# Altium PCB demo_dermis_main_testboard.PcbDoc (part 1 of 7)
Units mm, origin at the board's own origin, x right, y up, seen from the top; angles counter-clockwise.
Board outline 348.67 x 252.79 mm, 4 copper layers (Top Layer, Layer 1, Layer 2, Bottom Layer), stack 0.603 mm thick; 389 components, 231 nets, 2086 pads, 2626 vias.
Unrouted connection lines stored in the file: 34.
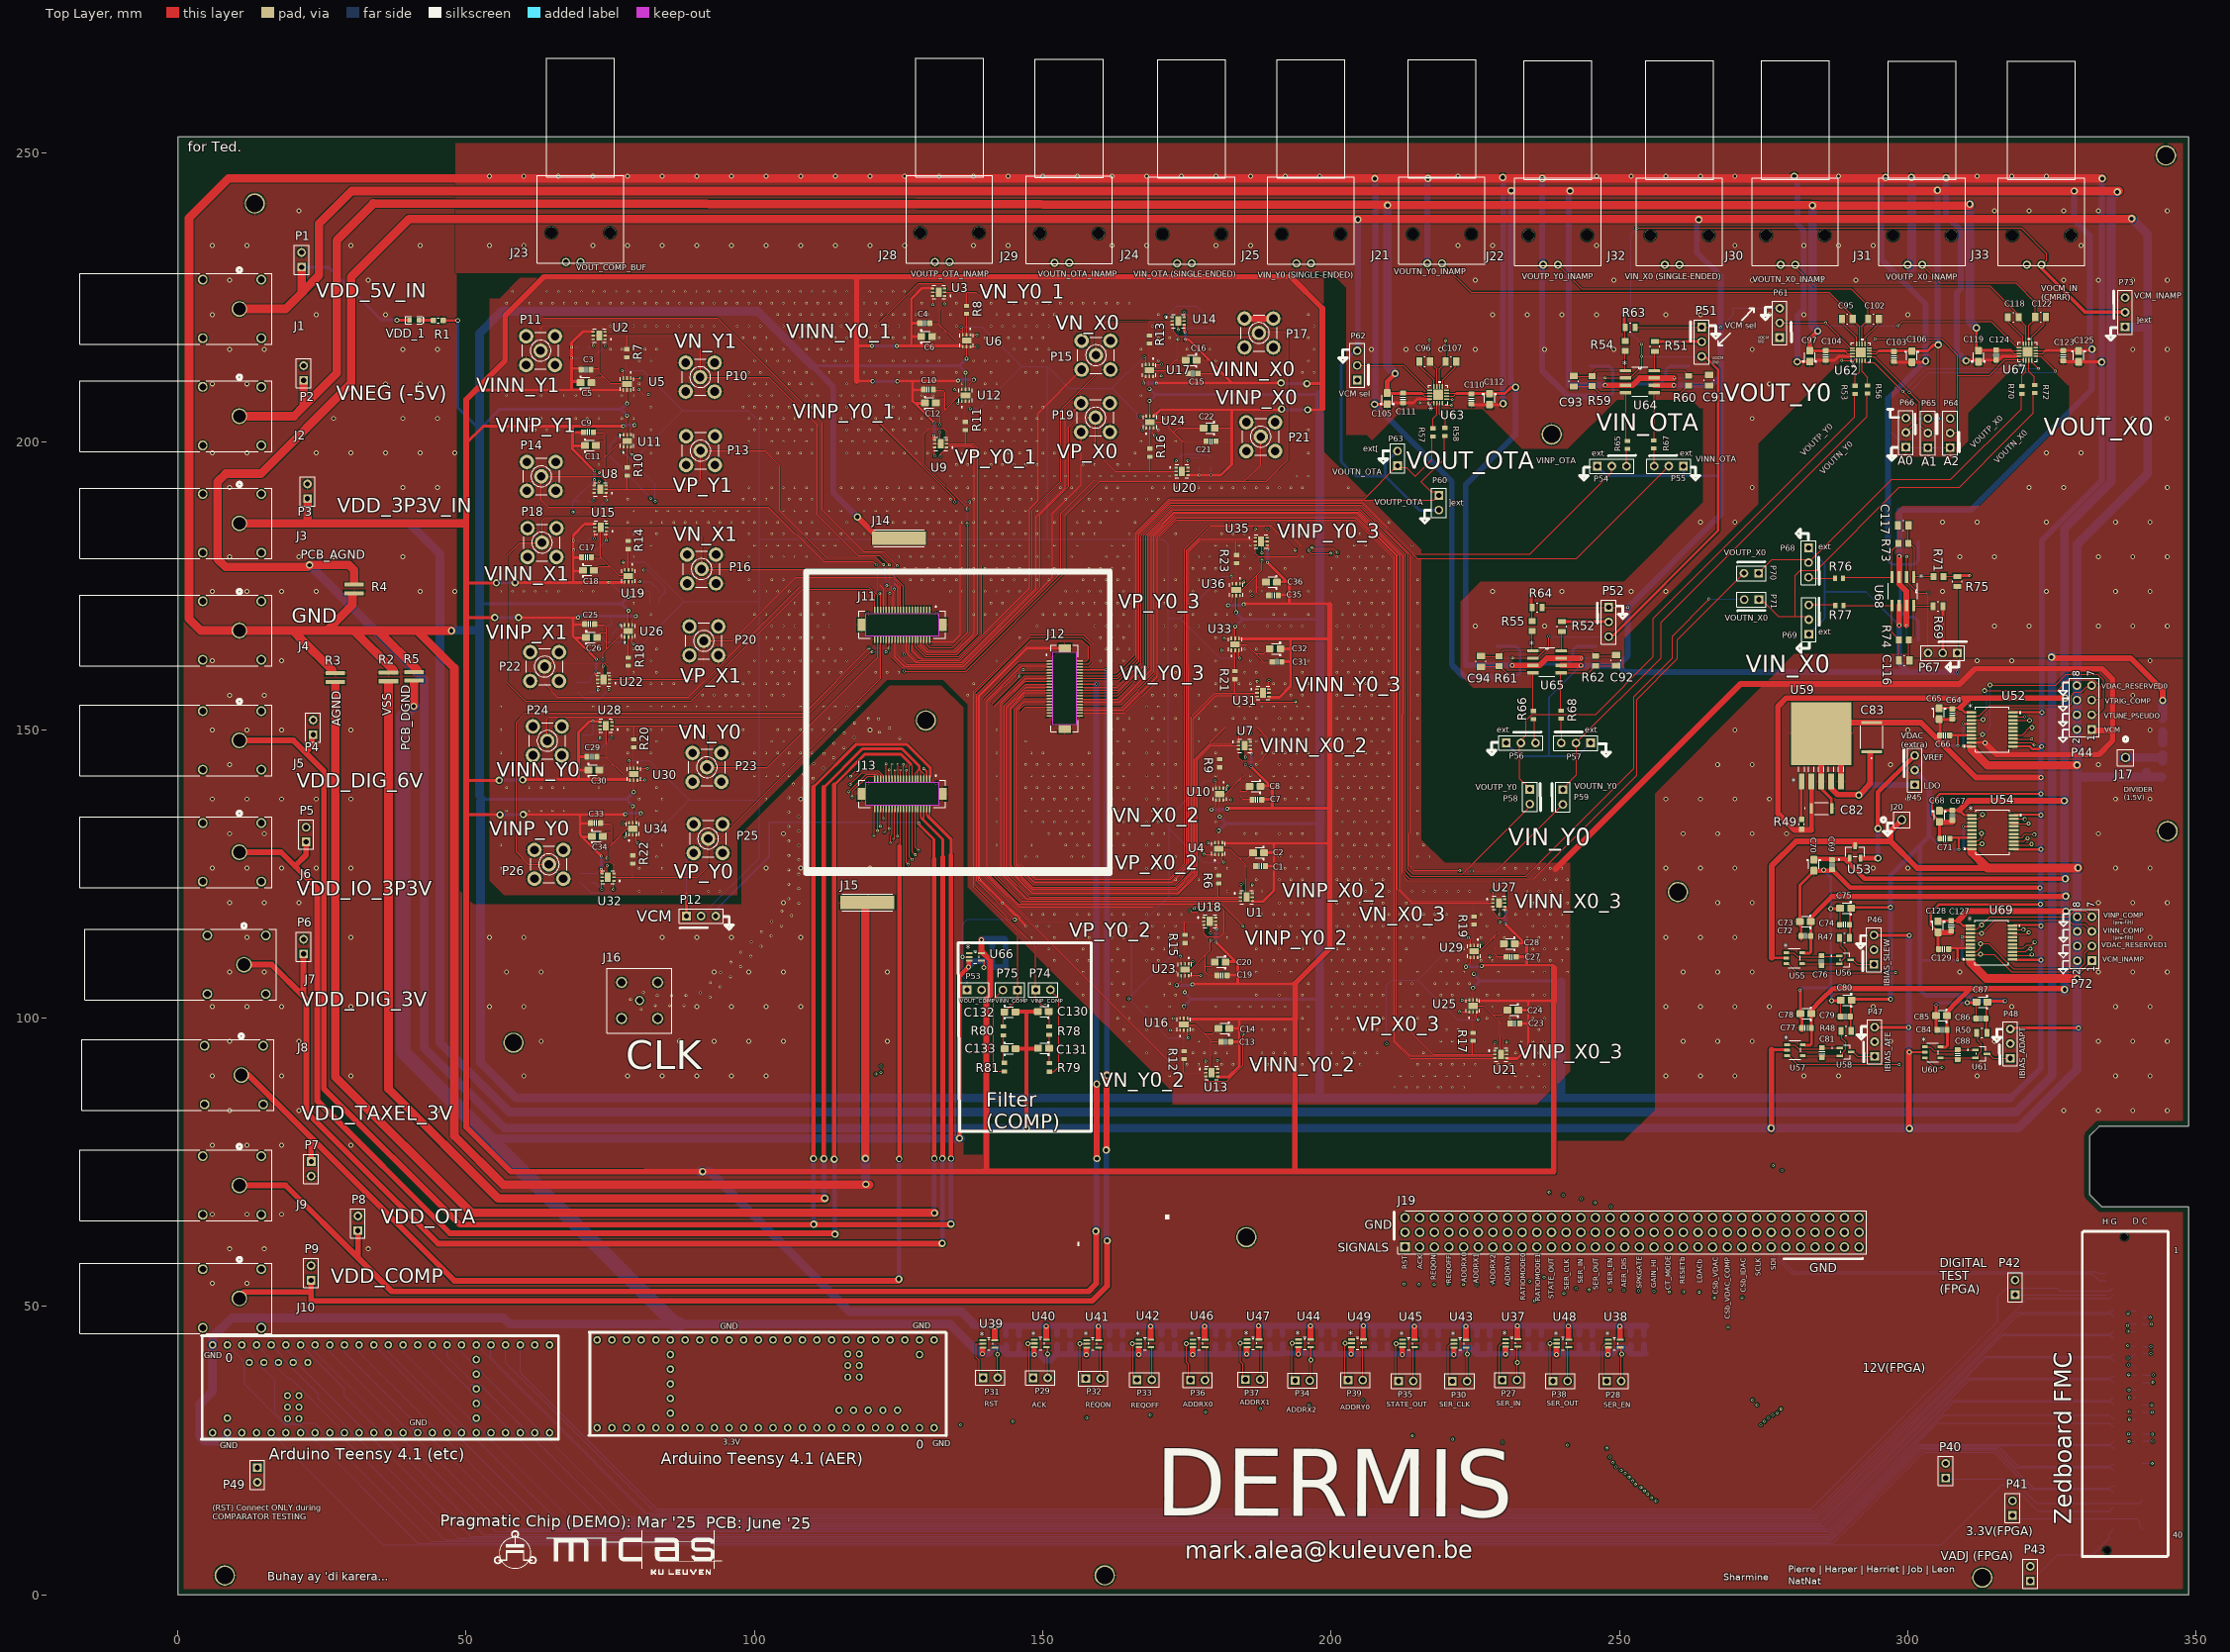
[diagram p0: Top Layer view]
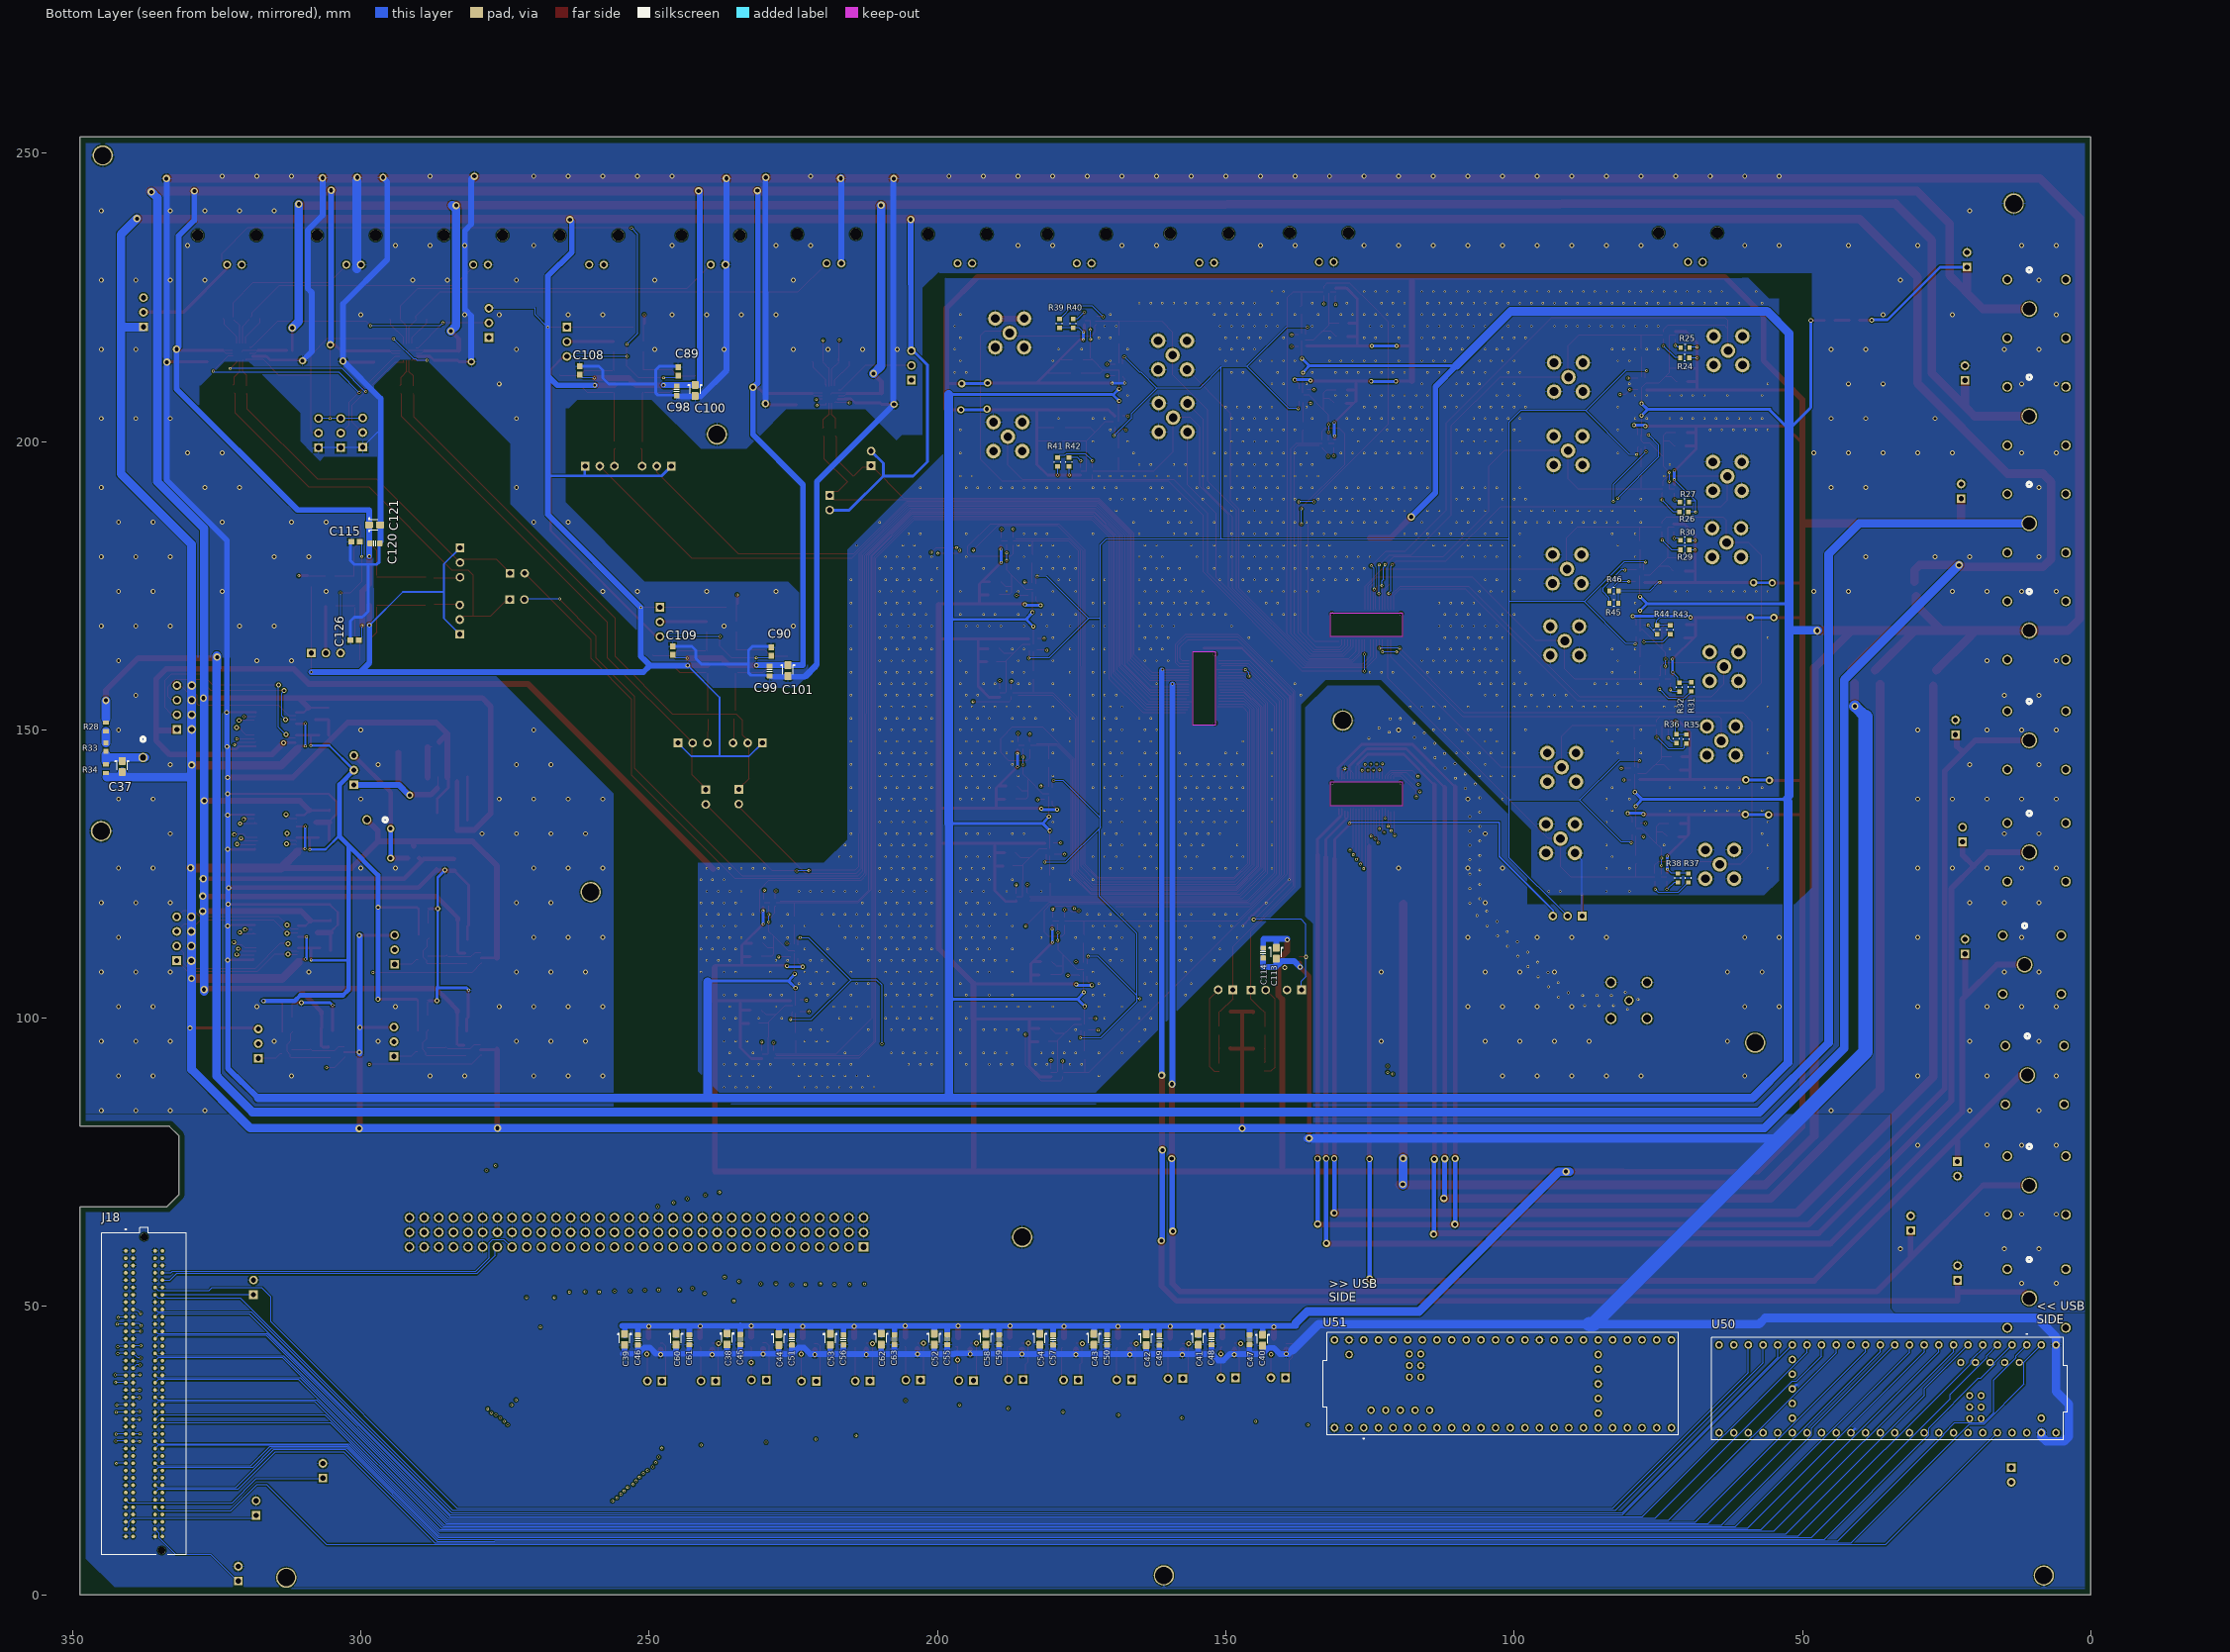
[diagram p1: Bottom Layer view, seen from below]
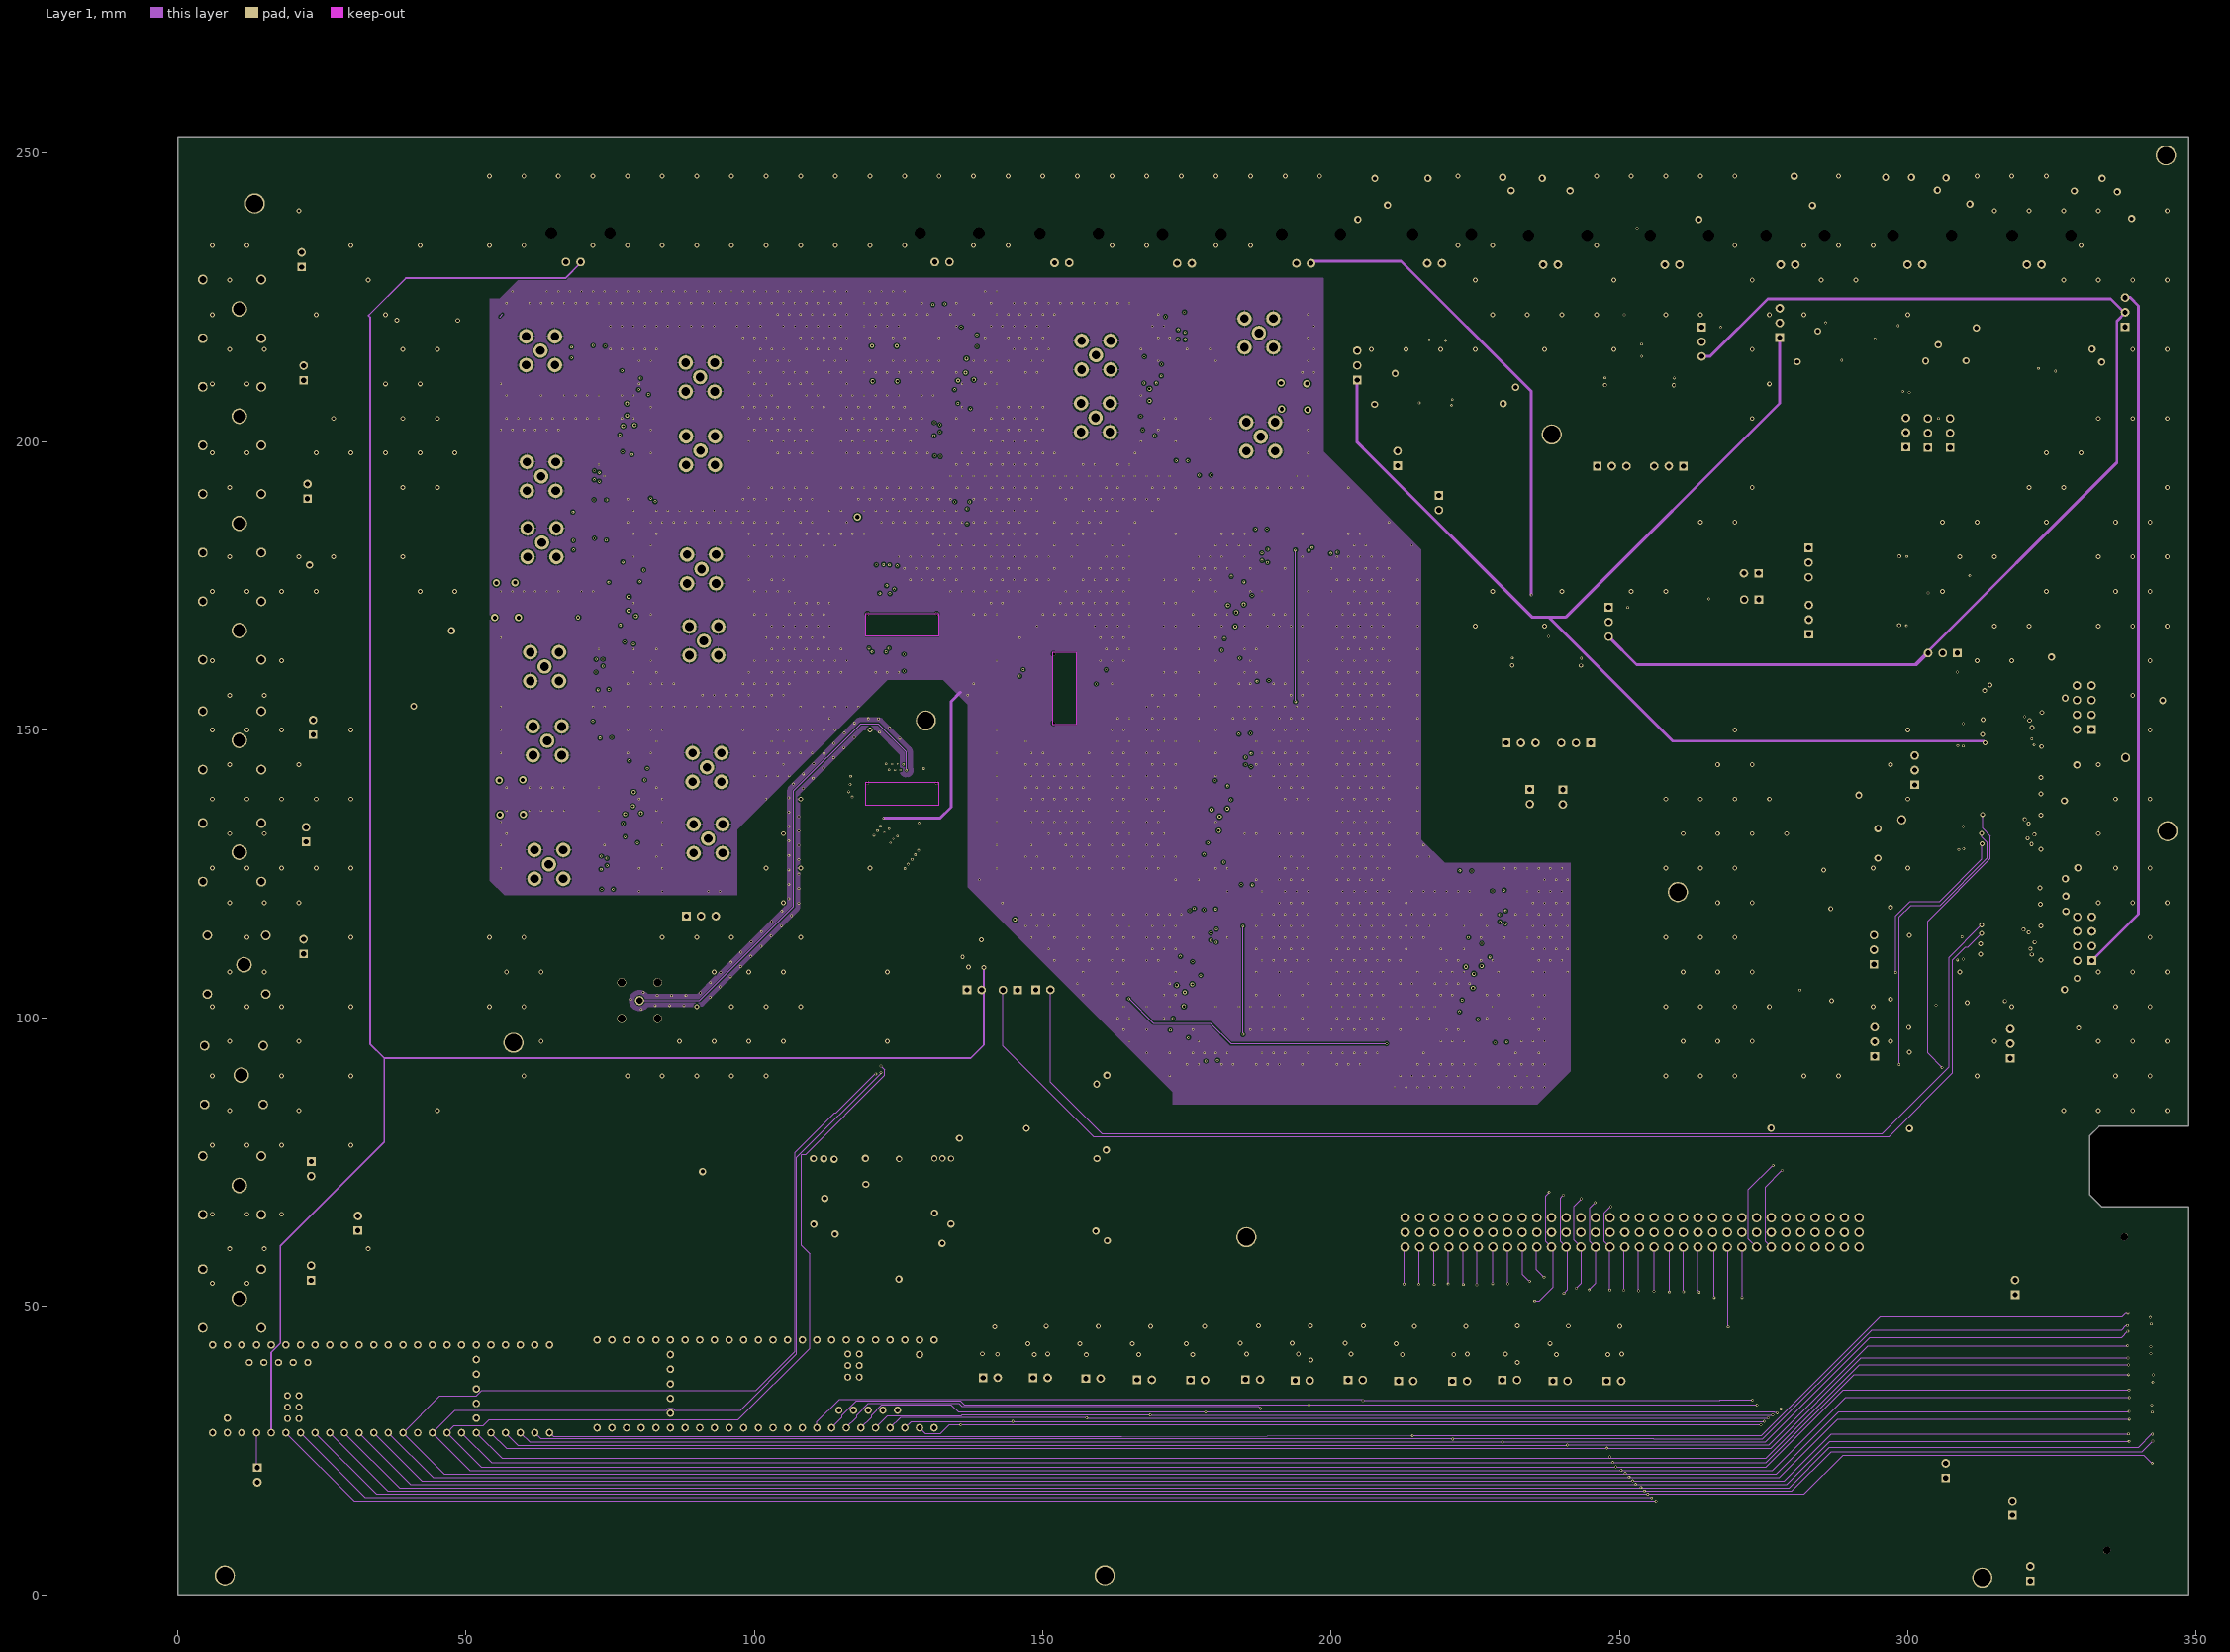
[diagram p2: Layer 1]
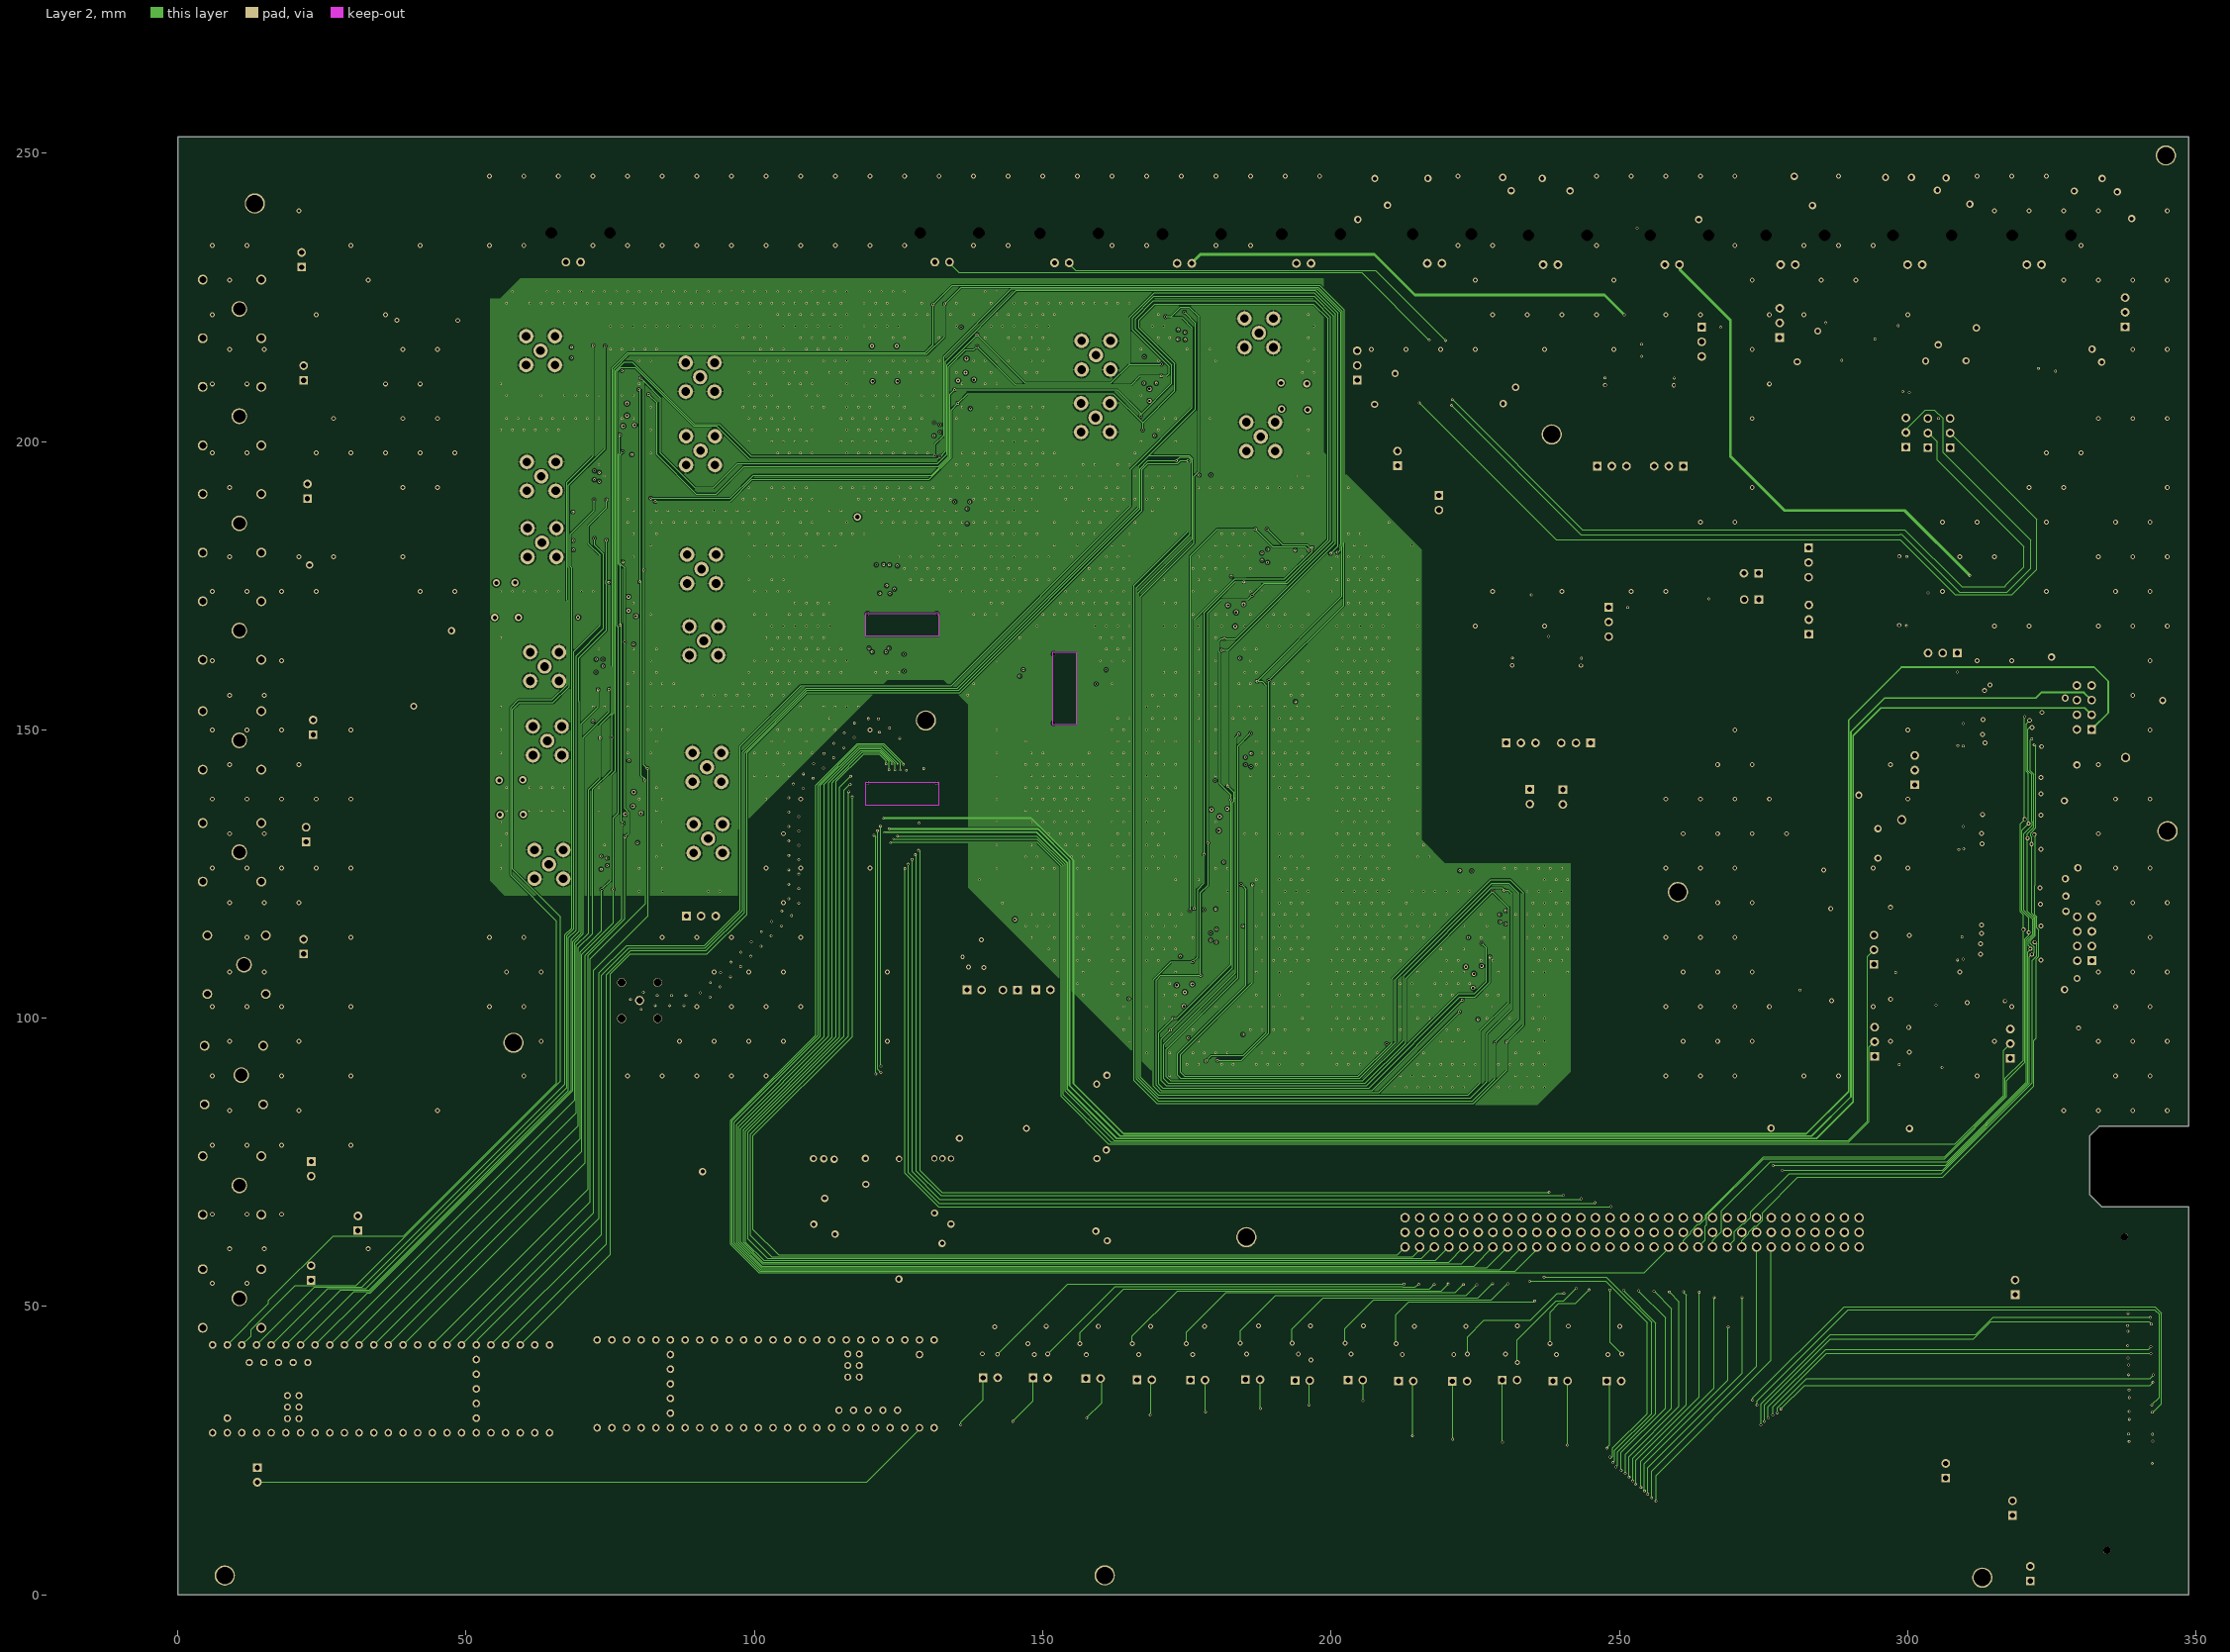
[diagram p3: Layer 2]
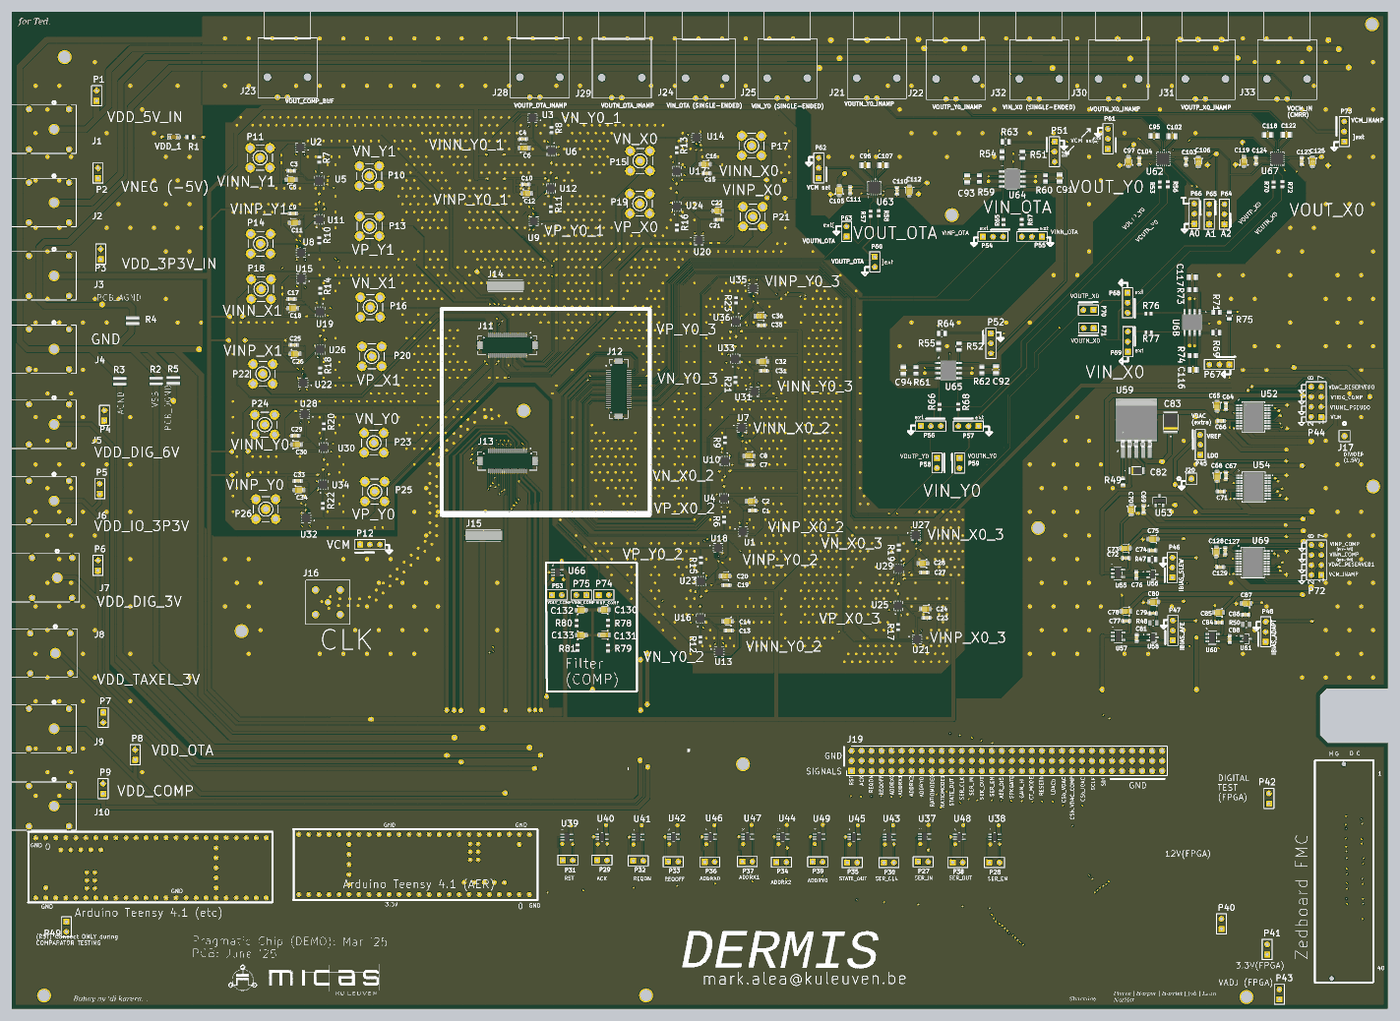
[diagram p9: 3D render of the assembled board from above, using the file's embedded part models]
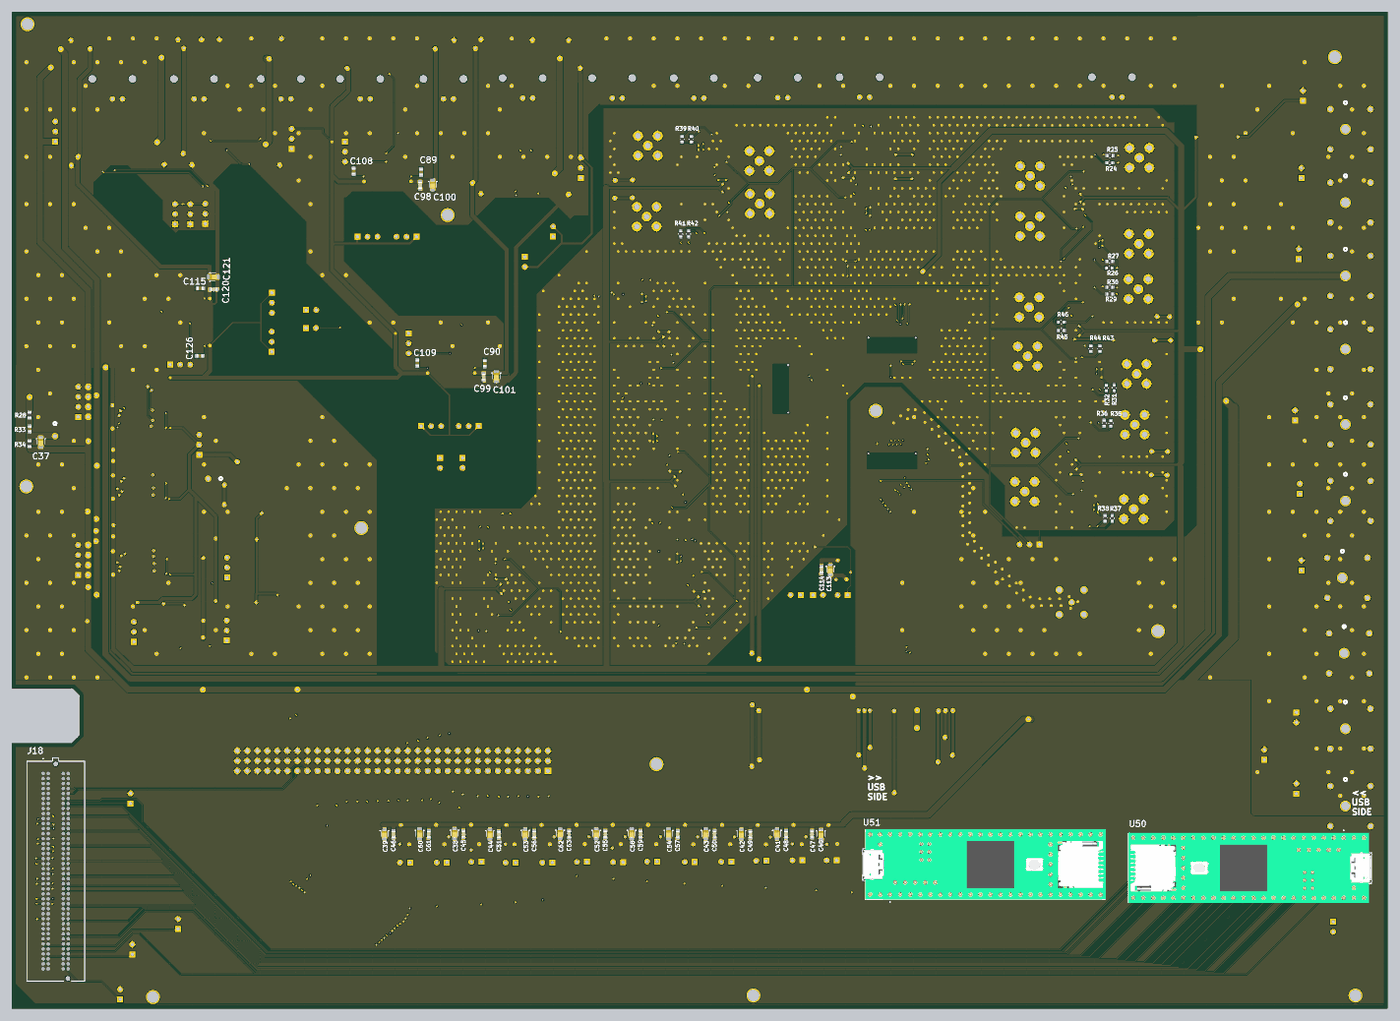
[diagram p10: 3D render of the assembled board from below, using the file's embedded part models]

## Layer stack, top to bottom
Top Solder: solder mask 0.0102, Solder Resist, Dk 3.5
Top Layer: signal copper 0.0356
Dielectric 2: prepreg 0.0711, PP-006, Dk 4.1
Layer 1: signal copper 0.035
Dielectric 1: dielectric 0.32, FR-4, Dk 4.8
Layer 2: signal copper 0.035
Dielectric 3: prepreg 0.0711, PP-006, Dk 4.1
Bottom Layer: signal copper 0.0356
Bottom Solder: solder mask 0.0102, Solder Resist, Dk 3.5

## Board outline
331.542,79.589 333.2,81.247 348.668,81.247 348.668,89.263 348.667,252.789 0,252.789 0,0 348.667,0 348.668,67.317 333.607,67.317 331.542,69.382

## Design rules (kind name [scope] priority, off if disabled: settings)
BoardOutlineClearance [All] p1: gap=1 ignorepadtopadclearanceinfootprint=FALSE except(0: Arc-SplitContinuation Track-SplitContinuation SMDPad-SplitContinuation THPad-SplitContinuation Via-SplitContinuation Fill-SplitContinuation Poly-SplitContinuation Region-SplitContinuation Text-SplitContinuation)
Clearance [OnLayer('Top Layer') vs InNet('VCM')] p1: gap=0.1 ignorepadtopadclearanceinfootprint=FALSE except(0: Arc-Hole Track-Hole SMDPad-Hole THPad-Hole Via-Hole Fill-Hole Poly-Hole Region-Hole Text-Hole; 0.15: Arc-Text Track-Text SMDPad-Text THPad-Text Via-Text Fill-Text Poly-Text Region-Text Text-Text; 0.2: Arc-Via Arc-Poly Track-Via SMDPad-Via THPad-Via THPad-Poly Via-Via Via-Poly Fill-Poly Poly-Poly)
Clearance Clearance_1 [All] p2: gap=0.1 ignorepadtopadclearanceinfootprint=FALSE except(0: Arc-Hole Track-Hole SMDPad-Hole THPad-Hole Via-Hole Fill-Hole Poly-Hole Region-Hole Text-Hole; 0.15: Arc-Text Track-Text SMDPad-Text THPad-Text Via-Text Fill-Text Poly-Text Region-Text Text-Text; 0.2: Arc-Via Arc-Poly Track-Via Track-Poly SMDPad-Via SMDPad-Poly THPad-Via THPad-Poly Via-Via Via-Poly Fill-Poly Poly-Poly)
HoleSize [All] p1: absolutevalues=TRUE maxlimit=6 minlimit=0.2 maxpercent=80.000 minpercent=20.000
HoleToHoleClearance [All] p1: gap=0.25 allowstackedmicrovias=TRUE
MinimumSolderMaskSliver [All] p1: minsoldermaskwidth=0.1
PolygonConnect [All] p1: connectstyle=Relief reliefconductorwidth=0.254 reliefentries=4 polygonreliefangle="90 Angle" airgapwidth=0.254
RoutingVias [All] p1: holewidth=0.711 width=1.27 viastyle="Through Hole" minholewidth=0.075 minwidth=0.2 maxholewidth=0.711 maxwidth=2
SilkToSilkClearance [All] p1: silktosilkclearance=0.15
SilkToSolderMaskClearance [IsPad] p1: minsilkscreentomaskgap=0.15 clearancetoexposedcopper=TRUE
SolderMaskExpansion [All] p1: expansion=0.102
UnpouredPolygon UnpouredPolygon_1 [All] p1:
Width [All] p1: maxlimit=6 minlimit=0.1 preferedwidth=0.254 checkconnectedcopper=TRUE
24 further rules are at their usual default settings.

## Classes and differential pairs
component class demo_dermis_main_testboard_ncd2400: C1 C2 C3 C4 C5 C6 C7 C8 C9 C10 C11 C12 C13 C14 C15 C16 C17 C18 C19 C20 C21 C22 C23 C24 C25 C26 C27 C28 C29 C30 C31 C32 C33 C34 C35 C36 P10 P11 P12 P13 P14 P15 P16 P17 P18 P19 P20 P21 P22 P23 P24 P25 P26 R6 R7 R8 R9 R10 R11 R12 R13 R14 R15 R16 R17 R18 R19 R20 R21 R22 R23 U1 U2 U3 U4 U5 U6 U7 U8 U9 U10 U11 U12 U13 U14 U15 U16 U17 U18 U19 U20 U21 U22 U23 U24 U25 U26 U27 U28 U29 U30 U31 U32 U33 U34 U35 U36
component class demo_dermis_main_testboard_back: C37 J17 R24 R25 R26 R27 R28 R29 R30 R31 R32 R33 R34 R35 R36 R37 R38 R39 R40 R41 R42 R43 R44 R45 R46
component class demo_dermis_main_testboard_dig: C38 C39 C40 C41 C42 C43 C44 C45 C46 C47 C48 C49 C50 C51 C52 C53 C54 C55 C56 C57 C58 C59 C60 C61 C62 C63 J18 J19 P27 P28 P29 P30 P31 P32 P33 P34 P35 P36 P37 P38 P39 P40 P41 P42 P43 P49 U37 U38 U40 U41 U42 U43 U44 U45 U46 U47 U48 U49 U50 U51
component class demo_dermis_main_testboard_ibias: C64 C65 C66 C67 C68 C69 C70 C71 C72 C73 C74 C75 C76 C77 C78 C79 C80 C81 C82 C83 C84 C85 C86 C87 C88 C127 C128 C129 C130 C131 C132 C133 J20 P44 P45 P46 P47 P48 P72 P74 P75 R47 R48 R49 R50 R78 R79 R80 R81 U52 U53 U54 U55 U56 U57 U58 U59 U60 U61 U69
component class demo_dermis_main_testboard: J1 J2 J3 J4 J5 J6 J7 J8 J9 J10 J11 J12 J13 J14 J15 J16 P1 P2 P3 P4 P5 P6 P7 P8 P9 R1 R2 R3 R4 R5 VDD_1
component class demo_dermis_main_testboard_inamps: C89 C90 C91 C92 C93 C94 C95 C96 C97 C98 C99 C100 C101 C102 C103 C104 C105 C106 C107 C108 C109 C110 C111 C112 C113 C114 C115 C116 C117 C118 C119 C120 C121 C122 C123 C124 C125 C126 J21 J22 J23 J24 J25 J28 J29 J30 J31 J32 J33 P51 P52 P53 P54 P55 P56 P57 P58 P59 P60 P61 P62 P63 P64 P65 P66 P67 P68 P69 P70 P71 P73 R51 R52 R53 R54 R55 R56 R57 R58 R59 R60 R61 R62 R63 R64 R65 R66 R67 R68 R69 R70 R71 R72 R73 R74 R75 R76 R77 U62 U63 U64 U65 U66 U67 U68

## Components (designator, comment, footprint, x,y, rotation, side; value= is the part's Value field where it differs from the comment)
C1 "approved sub OK" CAPC1608N 187.743,126.373 r180 top value=100n
C2 "10µ" CAPMP2012X150USR 187.414,128.668 r180 top
C3 "approved sub OK" CAPC1608N 70.786,212.455 r0 top value=100n
C4 "approved sub OK" CAPC1608N 129.523,220.514 r0 top value=100n
C5 "10µ" CAPMP2012X150USR 70.785,210.191 r0 top
C6 "10µ" CAPMP2012X150USR 129.852,218.218 r0 top
C7 "approved sub OK" CAPC1608N 187.117,137.889 r180 top value=100n
C8 "10µ" CAPMP2012X150USR 186.788,140.185 r180 top
C9 "approved sub OK" CAPC1608N 71.221,201.601 r0 top value=100n
C10 "approved sub OK" CAPC1608N 130.149,208.997 r0 top value=100n
C11 "10µ" CAPMP2012X150USR 71.55,199.305 r0 top
C12 "10µ" CAPMP2012X150USR 130.478,206.702 r0 top
C13 "approved sub OK" CAPC1608N 181.706,95.913 r180 top value=100n
C14 "10µ" CAPMP2012X150USR 181.376,98.209 r180 top
C15 "approved sub OK" CAPC1608N 176.034,211.804 r180 top value=100n
C16 "10µ" CAPMP2012X150USR 175.704,214.1 r180 top
C17 "approved sub OK" CAPC1608N 70.867,179.948 r0 top value=100n
C18 "10µ" CAPMP2012X150USR 71.196,177.652 r0 top
C19 "approved sub OK" CAPC1608N 181.08,107.43 r180 top value=100n
C20 "10µ" CAPMP2012X150USR 180.75,109.725 r180 top
C21 "approved sub OK" CAPC1608N 179.171,200.041 r180 top value=100n
C22 "10µ" CAPMP2012X150USR 178.842,202.337 r180 top
C23 "approved sub OK" CAPC1608N 231.843,99.098 r180 top value=100n
C24 "10µ" CAPMP2012X150USR 231.514,101.394 r180 top
C25 "approved sub OK" CAPC1608N 71.42,168.323 r0 top value=100n
C26 "10µ" CAPMP2012X150USR 71.75,166.027 r0 top
C27 "approved sub OK" CAPC1608N 231.217,110.615 r180 top value=100n
C28 "10µ" CAPMP2012X150USR 230.888,112.91 r180 top
C29 "approved sub OK" CAPC1608N 71.809,145.339 r0 top value=100n
C30 "10µ" CAPMP2012X150USR 72.138,143.044 r0 top
C31 "approved sub OK" CAPC1608N 190.604,161.786 r180 top value=100n
C32 "10µ" CAPMP2012X150USR 190.274,164.082 r180 top
C33 "approved sub OK" CAPC1608N 72.435,133.823 r0 top value=100n
C34 "10µ" CAPMP2012X150USR 72.764,131.527 r0 top
C35 "approved sub OK" CAPC1608N 189.978,173.303 r180 top value=100n
C36 "10µ" CAPMP2012X150USR 189.648,175.598 r180 top
C37 "10µ" CAPMP2012X150USR 341.36,143.646 r270 bottom
C38 "10µ" CAPMP2012X150USR 236.473,44.376 r270 bottom
C39 "10µ" CAPMP2012X150USR 254.249,44.286 r270 bottom
C40 "10µ" CAPMP2012X150USR 143.601,44.175 r270 bottom
C41 "10µ" CAPMP2012X150USR 154.747,44.312 r270 bottom
C42 "10µ" CAPMP2012X150USR 163.8,44.258 r270 bottom
C43 "10µ" CAPMP2012X150USR 172.86,44.307 r270 bottom
C44 "10µ" CAPMP2012X150USR 227.509,44.267 r270 bottom
C45 "approved sub OK" CAPC1608N 234.184,44.284 r270 bottom value=100n
C46 "approved sub OK" CAPC1608N 251.96,44.193 r270 bottom value=100n
C47 "approved sub OK" CAPC1608N 145.889,44.268 r270 bottom value=100n
C48 "approved sub OK" CAPC1608N 152.458,44.22 r270 bottom value=100n
C49 "approved sub OK" CAPC1608N 161.512,44.165 r270 bottom value=100n
C50 "approved sub OK" CAPC1608N 170.571,44.215 r270 bottom value=100n
C51 "approved sub OK" CAPC1608N 225.22,44.174 r270 bottom value=100n
C52 "10µ" CAPMP2012X150USR 200.563,44.347 r270 bottom
C53 "10µ" CAPMP2012X150USR 218.58,44.296 r270 bottom
C54 "10µ" CAPMP2012X150USR 182.229,44.307 r270 bottom
C55 "approved sub OK" CAPC1608N 198.275,44.254 r270 bottom value=100n
C56 "approved sub OK" CAPC1608N 216.291,44.204 r270 bottom value=100n
C57 "approved sub OK" CAPC1608N 179.941,44.215 r270 bottom value=100n
C58 "10µ" CAPMP2012X150USR 191.602,44.352 r270 bottom
C59 "approved sub OK" CAPC1608N 189.313,44.26 r270 bottom value=100n
C60 "10µ" CAPMP2012X150USR 245.32,44.315 r270 bottom
C61 "approved sub OK" CAPC1608N 243.031,44.223 r270 bottom value=100n
C62 "10µ" CAPMP2012X150USR 209.732,44.357 r270 bottom
C63 "approved sub OK" CAPC1608N 207.444,44.265 r270 bottom value=100n
C64 "approved sub OK" CAPC1608N 307.698,152.772 r270 top value=100n
C65 "10µ" CAPMP2012X150USR 305.434,152.796 r270 top
C66 "approved sub OK" CAPC1608N 306.383,149.053 r180 top value=100n
C67 "approved sub OK" CAPC1608N 307.717,135.183 r270 top value=100n
C68 "10µ" CAPMP2012X150USR 305.453,135.007 r270 top
C69 "approved sub OK" CAPC1608N 286.841,126.613 r270 top value=100n
C70 "10µ" CAPMP2012X150USR 283.718,126.524 r270 top
C71 "approved sub OK" CAPC1608N 306.421,131.136 r180 top value=100n
C72 "approved sub OK" CAPC1608N 282.298,114.247 r180 top value=100n
C73 "10µ" CAPMP2012X150USR 282.204,116.724 r180 top
C74 "approved sub OK" CAPC1608N 289.029,116.22 r180 top value=100n
C75 "10µ" CAPMP2012X150USR 289.213,119.087 r180 top
C76 "47p" CAPC1608N 285.004,109.975 r90 top
C77 "approved sub OK" CAPC1608N 282.399,98.296 r180 top value=100n
C78 "10µ" CAPMP2012X150USR 282.305,100.773 r180 top
C79 "approved sub OK" CAPC1608N 289.13,100.269 r180 top value=100n
C80 "10µ" CAPMP2012X150USR 289.314,103.136 r180 top
C81 "47p" CAPC1608N 285.105,94.023 r90 top
C82 "C3216X5R1A686M160AC" CAP_3216_TDK 285.041,136.409 r0 top
C83 "C4532X7R1C336M250KC" CAP_4532_TDK 293.711,148.729 r90 top
C84 "approved sub OK" CAPC1608N 305.929,97.962 r180 top value=100n
C85 "10µ" CAPMP2012X150USR 305.835,100.439 r180 top
C86 "approved sub OK" CAPC1608N 312.66,99.935 r180 top value=100n
C87 "10µ" CAPMP2012X150USR 312.844,102.802 r180 top
C88 "47p" CAPC1608N 308.635,93.69 r90 top
C89 "C0603C221K5RACTU" CAPC17595_87N_KEM 244.943,212.149 r90 bottom
C90 "C0603C221K5RACTU" CAPC17595_87N_KEM 228.826,163.565 r90 bottom
C91 "CML0805C0G150JT50V" CAP_CML_0805_.3pF-1500pF,4700pF_STP 265.544,210.631 r270 top value=15p
C92 "CML0805C0G150JT50V" CAP_CML_0805_.3pF-1500pF,4700pF_STP 249.427,162.047 r270 top value=15p
C93 "CML0805C0G150JT50V" CAP_CML_0805_.3pF-1500pF,4700pF_STP 242.063,210.445 r270 top value=15p
C94 "CML0805C0G150JT50V" CAP_CML_0805_.3pF-1500pF,4700pF_STP 225.947,161.862 r270 top value=15p
C95 "CML0805C0G3R0CT50V" CAP_CML_0805_.3pF-1500pF,4700pF_STP 289.491,221.265 r180 top value=3p
C96 "CML0805C0G3R0CT50V" CAP_CML_0805_.3pF-1500pF,4700pF_STP 216.215,213.893 r180 top value=3p
C97 "10µ" CAPMP2012X150USR 282.994,214.812 r90 top
C98 "approved sub OK" CAPC1608N 245.207,208.784 r270 bottom value=100n
C99 "approved sub OK" CAPC1608N 229.091,160.2 r270 bottom value=100n
C100 "10µ" CAPMP2012X150USR 242.018,208.856 r270 bottom
C101 "10µ" CAPMP2012X150USR 225.901,160.272 r270 bottom
C102 "CML0805C0G3R0CT50V" CAP_CML_0805_.3pF-1500pF,4700pF_STP 294.034,221.241 r180 top value=3p
C103 "approved sub OK" CAPC1608N 297.586,214.748 r270 top value=100n
C104 "approved sub OK" CAPC1608N 285.754,214.924 r90 top value=100n
C105 "10µ" CAPMP2012X150USR 209.717,207.44 r90 top
C106 "10µ" CAPMP2012X150USR 300.712,214.713 r270 top
C107 "CML0805C0G3R0CT50V" CAP_CML_0805_.3pF-1500pF,4700pF_STP 220.757,213.869 r180 top value=3p
C108 "C0603C221K5RACTU" CAPC17595_87N_KEM 262.037,212.319 r90 bottom
C109 "C0603C221K5RACTU" CAPC17595_87N_KEM 245.92,163.736 r90 bottom
C110 "approved sub OK" CAPC1608N 224.309,207.376 r270 top value=100n
C111 "approved sub OK" CAPC1608N 212.477,207.552 r90 top value=100n
C112 "10µ" CAPMP2012X150USR 227.435,207.341 r270 top
C113 "10µ" CAPMP2012X150USR 141.246,111.261 r270 bottom
C114 "approved sub OK" CAPC1608N 143.513,111.297 r270 bottom value=100n
C115 "C0603C221K5RACTU" CAPC17595_87N_KEM 300.901,182.616 r0 bottom
C116 "CML0805C0G150JT50V" CAP_CML_0805_.3pF-1500pF,4700pF_STP 299.384,162.016 r180 top value=15p
C117 "CML0805C0G150JT50V" CAP_CML_0805_.3pF-1500pF,4700pF_STP 299.198,185.496 r180 top value=15p
C118 "CML0805C0G3R0CT50V" CAP_CML_0805_.3pF-1500pF,4700pF_STP 318.277,221.545 r180 top value=3p
C119 "10µ" CAPMP2012X150USR 312.235,214.8 r90 top
C120 "approved sub OK" CAPC1608N 297.537,182.352 r180 bottom value=100n
C121 "10µ" CAPMP2012X150USR 297.608,185.541 r180 bottom
C122 "CML0805C0G3R0CT50V" CAP_CML_0805_.3pF-1500pF,4700pF_STP 323.028,221.575 r180 top value=3p
C123 "approved sub OK" CAPC1608N 326.929,214.897 r270 top value=100n
C124 "approved sub OK" CAPC1608N 315.312,214.995 r90 top value=100n
C125 "10µ" CAPMP2012X150USR 329.631,214.763 r270 top
C126 "C0603C221K5RACTU" CAPC17595_87N_KEM 301.072,165.523 r0 bottom
C127 "approved sub OK" CAPC1608N 307.501,116.03 r270 top value=100n
C128 "10µ" CAPMP2012X150USR 305.237,115.853 r270 top
C129 "approved sub OK" CAPC1608N 306.205,111.982 r180 top value=100n
C130 "10µ" CAPMP2012X150USR 150.088,101.171 r180 top
C131 "10µ" CAPMP2012X150USR 150.117,94.791 r180 top
C132 "10µ" CAPMP2012X150USR 144.287,101.087 r0 top
C133 "10µ" CAPMP2012X150USR 144.316,94.707 r0 top
J1 "FCR7350R" CONN1_FCR7350R_CLF 10.67,222.987 r270 top
J2 "FCR7350R" CONN1_FCR7350R_CLF 10.67,204.398 r270 top
J3 "FCR7350R" CONN1_FCR7350R_CLF 10.67,185.809 r270 top
J4 "FCR7350R" CONN1_FCR7350R_CLF 10.67,167.22 r270 top
J5 "FCR7350R" CONN1_FCR7350R_CLF 10.674,148.175 r270 top
J6 "FCR7350R" CONN1_FCR7350R_CLF 10.674,128.764 r270 top
J7 "FCR7350R" CONN1_FCR7350R_CLF 11.469,109.271 r270 top
J8 "FCR7350R" CONN1_FCR7350R_CLF 11.003,90.135 r270 top
J9 "FCR7350R" CONN1_FCR7350R_CLF 10.674,71 r270 top
J10 "FCR7350R" CONN1_FCR7350R_CLF 10.674,51.398 r270 top
J11 "DF17(4.0)-40DP-0.5V(57)" HRS_DF17(4.0)-40DP-0.5V(57) 125.596,168.224 r180 top locked
J12 "DF17(4.0)-40DP-0.5V(57)" HRS_DF17(4.0)-40DP-0.5V(57) 153.78,157.164 r270 top locked
J13 "DF17(4.0)-40DP-0.5V(57)" HRS_DF17(4.0)-40DP-0.5V(57) 125.595,138.905 r180 top locked
J14 "S1711-46R" HARWIN_S1711-46R 125.062,183.253 r180 top
J15 "S1711-46R" HARWIN_S1711-46R 119.562,120.052 r180 top
J16 "VB335-75" CONN5_VB335_CIN 80.069,103.068 r0 top
J17 "901200761" CONN_90120-0761_MOL 337.755,145.193 r270 top
J18 "ASP-127797-01" SAMTEC_ASP-127797-01 337.571,34.89 r90 bottom locked
J19 "TSW-132-09-G-T" HDRV96W64P254_3X32_8128X749X838P 212.804,60.323 r0 top
J20 "901200761" CONN_90120-0761_MOL 298.945,134.405 r0 top
J21 "CONBNC002" CONN_CONBN_LNX 219.207,238.338 r0 top
J22 "CONBNC002" CONN_CONBN_LNX 239.298,238.126 r0 top
J23 "CONBNC002" CONN_CONBN_LNX 69.841,238.57 r0 top
J24 "CONBNC002" CONN_CONBN_LNX 175.827,238.339 r0 top
J25 "CONBNC002" CONN_CONBN_LNX 196.515,238.338 r0 top
J28 "CONBNC002" CONN_CONBN_LNX 133.818,238.57 r0 top
J29 "CONBNC002" CONN_CONBN_LNX 154.572,238.445 r0 top
J30 "CONBNC002" CONN_CONBN_LNX 280.483,238.126 r0 top
J31 "CONBNC002" CONN_CONBN_LNX 302.501,238.126 r0 top
J32 "CONBNC002" CONN_CONBN_LNX 260.392,238.126 r0 top
J33 "CONBNC002" CONN_CONBN_LNX 323.185,238.126 r0 top
P1 "Header 2" HDR1X2 21.449,230.238 r90 top
P2 "Header 2" HDR1X2 21.826,210.612 r90 top
P3 "Header 2" HDR1X2 22.476,190.094 r90 top
P4 "Header 2" HDR1X2 23.462,149.167 r90 top
P5 "Header 2" HDR1X2 22.233,130.571 r90 top
P6 "Header 2" HDR1X2 21.792,111.148 r90 top
P7 "Header 2" HDR1X2 23.12,75.147 r270 top
P8 "Header 2" HDR1X2 31.223,63.169 r90 top
P9 "Header 2" HDR1X2 23.103,54.561 r90 top
P10 "SMB" SMB_V-RJ45 90.571,211.162 r0 top
P11 "SMB" SMB_V-RJ45 62.893,215.748 r0 top
P12 "Header 3" HDR1X3 88.193,117.712 r0 top
P13 "SMB" SMB_V-RJ45 90.64,198.41 r0 top
P14 "SMB" SMB_V-RJ45 63.026,193.957 r0 top
P15 "SMB" SMB_V-RJ45 159.219,214.965 r180 top
P16 "SMB" SMB_V-RJ45 90.82,177.884 r0 top
P17 "SMB" SMB_V-RJ45 187.471,218.813 r180 top
P18 "SMB" SMB_V-RJ45 63.142,182.47 r0 top
P19 "SMB" SMB_V-RJ45 159.13,204.135 r180 top
P20 "SMB" SMB_V-RJ45 91.211,165.423 r0 top
P21 "SMB" SMB_V-RJ45 187.785,200.835 r180 top
P22 "SMB" SMB_V-RJ45 63.596,160.969 r0 top
P23 "SMB" SMB_V-RJ45 91.748,143.505 r0 top
P24 "SMB" SMB_V-RJ45 64.069,148.091 r0 top
P25 "SMB" SMB_V-RJ45 91.956,131.136 r0 top
P26 "SMB" SMB_V-RJ45 64.341,126.682 r0 top
P27 "Header 2" HDR1X2 229.68,37.269 r0 top
P28 "Header 2" HDR1X2 247.755,37.076 r0 top
P29 "Header 2" HDR1X2 148.297,37.636 r0 top
P30 "Header 2" HDR1X2 221.015,37.058 r0 top
P31 "Header 2" HDR1X2 139.625,37.658 r0 top
P32 "Header 2" HDR1X2 157.468,37.524 r0 top
P33 "Header 2" HDR1X2 166.35,37.292 r0 top
P34 "Header 2" HDR1X2 193.747,37.166 r0 top
P35 "Header 2" HDR1X2 211.704,37.072 r0 top
P36 "Header 2" HDR1X2 175.583,37.245 r0 top
P37 "Header 2" HDR1X2 185.134,37.332 r0 top
P38 "Header 2" HDR1X2 238.444,37.091 r0 top
P39 "Header 2" HDR1X2 202.94,37.251 r0 top
P40 "Header 2" HDR1X2 306.568,20.257 r90 top
P41 "Header 2" HDR1X2 318.148,13.786 r90 top
P42 "Header 2" HDR1X2 318.599,52.058 r90 top
P43 "Header 2" HDR1X2 321.239,2.409 r90 top
P44 "Header 4X2" HDR2X4 331.856,150.075 r90 top
P45 "Header 3" HDR1X3 301.195,140.47 r90 top
P46 "Header 3" HDR1X3 294.132,109.327 r90 top
P47 "Header 3" HDR1X3 294.233,93.376 r90 top
P48 "Header 3" HDR1X3 317.763,93.042 r90 top
P49 "Header 2" HDR1X2 13.786,22.076 r270 top
P51 "Header 3" HDR1X3 264.248,219.829 r270 top
P52 "Header 3" HDR1X3 248.131,171.245 r270 top
P53 "Header 2" HDR1X2 136.838,104.903 r0 top
P54 "Header 3" HDR1X3 246.127,195.729 r0 top
P55 "Header 3" HDR1X3 261.085,195.729 r180 top
P56 "Header 3" HDR1X3 230.36,147.731 r0 top
P57 "Header 3" HDR1X3 244.974,147.726 r180 top
P58 "Header 2" HDR1X2 234.445,139.67 r270 top
P59 "Header 2" HDR1X2 240.167,139.62 r270 top
P60 "Header 2" HDR1X2 218.681,190.648 r270 top
P61 "Header 3" HDR1X3 277.78,218.025 r90 top
P62 "Header 3" HDR1X3 204.503,210.654 r90 top
P63 "Header 2" HDR1X2 211.499,195.804 r90 top
P64 "Header 3" HDR1X3 307.318,198.928 r90 top
P65 "Header 3" HDR1X3 303.467,198.922 r90 top
P66 "Header 3" HDR1X3 299.657,199.018 r90 top
P67 "Header 3" HDR1X3 308.582,163.311 r180 top
P68 "Header 3" HDR1X3 282.778,181.544 r270 top
P69 "Header 3" HDR1X3 282.83,166.582 r90 top
P70 "Header 2" HDR1X2 274.113,177.158 r180 top
P71 "Header 2" HDR1X2 274.15,172.587 r180 top
P72 "Header 4X2" HDR2X4 331.907,109.966 r90 top
P73 "Header 3" HDR1X3 337.679,219.874 r90 top
P74 "Header 2" HDR1X2 148.771,104.928 r0 top
P75 "Header 2" HDR1X2 145.612,104.894 r180 top
R1 "Thick Film" RESC1608N 45.163,220.997 r0 top value=866R
R2 "RCL06120000Z0EA" RCL0612_VIS 36.533,159.187 r270 top
R3 "RCL06120000Z0EA" RCL0612_VIS 27.307,159.085 r270 top
R4 "RCL06120000Z0EA" RCL0612_VIS 30.572,174.43 r90 top
R5 "RCL06120000Z0EA" RCL0612_VIS 40.936,159.287 r270 top
R6 "RMCF0603ZT0R00" STA_RMCF0603_STP 180.5,124.059 r270 top
R7 "RMCF0603ZT0R00" STA_RMCF0603_STP 77.875,215.31 r90 top
R8 "RMCF0603ZT0R00" STA_RMCF0603_STP 136.766,222.828 r90 top
R9 "RMCF0603ZT0R00" STA_RMCF0603_STP 180.697,144.192 r90 top
R10 "RMCF0603ZT0R00" STA_RMCF0603_STP 77.897,194.795 r270 top
R11 "RMCF0603ZT0R00" STA_RMCF0603_STP 136.569,202.695 r270 top
R12 "RMCF0603ZT0R00" STA_RMCF0603_STP 174.462,93.599 r270 top
R13 "RMCF0603ZT0R00" STA_RMCF0603_STP 168.453,217.692 r90 top
R14 "RMCF0603ZT0R00" STA_RMCF0603_STP 78.124,182.032 r90 top
R15 "RMCF0603ZT0R00" STA_RMCF0603_STP 174.66,113.732 r90 top
R16 "RMCF0603ZT0R00" STA_RMCF0603_STP 168.546,198.058 r270 top
R17 "RMCF0603ZT0R00" STA_RMCF0603_STP 224.6,96.784 r270 top
R18 "RMCF0603ZT0R00" STA_RMCF0603_STP 78.109,161.807 r270 top
R19 "RMCF0603ZT0R00" STA_RMCF0603_STP 224.797,116.917 r90 top
R20 "RMCF0603ZT0R00" STA_RMCF0603_STP 79.052,147.653 r90 top
R21 "RMCF0603ZT0R00" STA_RMCF0603_STP 183.36,159.472 r270 top
R22 "RMCF0603ZT0R00" STA_RMCF0603_STP 78.854,127.52 r270 top
R23 "RMCF0603ZT0R00" STA_RMCF0603_STP 183.558,179.605 r90 top
R24 "ERJ-3EKF1002V" RC0603N_PAN 70.423,214.504 r0 bottom
R25 "ERJ-3EKF1002V" RC0603N_PAN 70.339,216.294 r0 bottom
R26 "ERJ-3EKF1002V" RC0603N_PAN 70.563,187.789 r0 bottom
R27 "ERJ-3EKF1002V" RC0603N_PAN 70.436,189.499 r0 bottom
R28 "RNCF0603TKY10K0" STA_RNCF0603_STP 344.172,150.521 r90 bottom
R29 "ERJ-3EKF1002V" RC0603N_PAN 70.393,181.205 r0 bottom
R30 "ERJ-3EKF1002V" RC0603N_PAN 70.406,182.916 r0 bottom
R31 "ERJ-3EKF1002V" RC0603N_PAN 69.264,157.446 r270 bottom
R32 "ERJ-3EKF1002V" RC0603N_PAN 71.319,157.401 r270 bottom
R33 "RNCF0603TKY2K00" RES_RNCF0603_STP 344.196,147.01 r90 bottom
R34 "RNCF0603TKY10K0" STA_RNCF0603_STP 344.199,143.256 r90 bottom
R35 "ERJ-3EKF1002V" RC0603N_PAN 70.132,148.422 r270 bottom
R36 "ERJ-3EKF1002V" RC0603N_PAN 71.847,148.446 r270 bottom
R37 "ERJ-3EKF1002V" RC0603N_PAN 69.806,124.312 r270 bottom
R38 "ERJ-3EKF1002V" RC0603N_PAN 71.597,124.318 r270 bottom
R39 "ERJ-3EKF1002V" RC0603N_PAN 178.83,220.46 r90 bottom
R40 "ERJ-3EKF1002V" RC0603N_PAN 176.478,220.451 r90 bottom
R41 "ERJ-3EKF1002V" RC0603N_PAN 179.167,196.461 r90 bottom
R42 "ERJ-3EKF1002V" RC0603N_PAN 177.175,196.46 r90 bottom
R43 "ERJ-3EKF1002V" RC0603N_PAN 72.904,167.338 r270 bottom
R44 "ERJ-3EKF1002V" RC0603N_PAN 75.211,167.381 r270 bottom
R45 "ERJ-3EKF1002V" RC0603N_PAN 82.698,171.945 r0 bottom
R46 "ERJ-3EKF1002V" RC0603N_PAN 82.695,174.079 r0 bottom
R47 "ERA6AEB2432V" RES_ERA6A_0805_PAN 289.02,113.923 r180 top
R48 "ERA6AEB2433V" RES_ERA6A_0805_PAN 289.291,97.794 r180 top
R49 "Thick Film" RESC1608N 281.6,133.623 r270 top value=10K
R50 "ERA6AEB2433V" RES_ERA6A_0805_PAN 312.821,97.461 r180 top
R51 "ERA6AEB1021V" RES_ERA6A_0805_PAN 256.112,216.484 r270 top value=1.02k
R52 "ERA6AEB1021V" RES_ERA6A_0805_PAN 239.996,167.9 r270 top value=1.02k
R53 "RMCF0603ZT0R00" STA_RMCF0603_STP 290.891,208.963 r270 top
R54 "ERA-6AEB102V" RC0805N_PAN 250.973,216.559 r90 top value=1k
R55 "ERA-6AEB102V" RC0805N_PAN 234.856,167.975 r90 top value=1k
R56 "RMCF0603ZT0R00" STA_RMCF0603_STP 292.987,209.035 r270 top
R57 "RMCF0603ZT0R00" STA_RMCF0603_STP 217.614,201.591 r270 top
R58 "RMCF0603ZT0R00" STA_RMCF0603_STP 219.711,201.664 r270 top
R59 "ERA-6AEB102V" RC0805N_PAN 245.254,210.464 r270 top value=1k
R60 "ERA-6AEB102V" RC0805N_PAN 261.975,210.534 r270 top value=1k
R61 "ERA-6AEB102V" RC0805N_PAN 229.138,161.88 r270 top value=1k
R62 "ERA-6AEB102V" RC0805N_PAN 245.858,161.95 r270 top value=1k
R63 "ERA6AEB52R3V" RES_ERA6A_0805_PAN 251.843,219.799 r0 top value=52.3
R64 "ERA6AEB52R3V" RES_ERA6A_0805_PAN 235.726,171.216 r0 top value=52.3
R65 "RMCF0603ZT0R00" STA_RMCF0603_STP 251.359,199.421 r90 top
R66 "RMCF0603ZT0R00" STA_RMCF0603_STP 235.095,152.569 r90 top
R67 "RMCF0603ZT0R00" STA_RMCF0603_STP 255.913,199.489 r90 top
R68 "RMCF0603ZT0R00" STA_RMCF0603_STP 239.844,152.621 r90 top
R69 "ERA6AEB1021V" RES_ERA6A_0805_PAN 305.236,171.447 r180 top value=1.02k
R70 "RMCF0603ZT0R00" STA_RMCF0603_STP 319.786,208.94 r270 top
R71 "ERA-6AEB102V" RC0805N_PAN 305.312,176.586 r0 top value=1k
R72 "RMCF0603ZT0R00" STA_RMCF0603_STP 322.039,209.088 r270 top
R73 "ERA-6AEB102V" RC0805N_PAN 299.216,182.305 r180 top value=1k
R74 "ERA-6AEB102V" RC0805N_PAN 299.287,165.585 r180 top value=1k
R75 "ERA6AEB52R3V" RES_ERA6A_0805_PAN 308.552,175.716 r270 top value=52.3
R76 "RMCF0603ZT0R00" STA_RMCF0603_STP 288.069,176.295 r0 top
R77 "RMCF0603ZT0R00" STA_RMCF0603_STP 288.121,171.546 r0 top
R78 "RNCF0603TKY10K0" STA_RNCF0603_STP 151.108,97.843 r270 top
R79 "RNCF0603TKY10K0" STA_RNCF0603_STP 151.136,91.464 r270 top
R80 "RNCF0603TKY10K0" STA_RNCF0603_STP 143.163,97.791 r270 top
R81 "RNCF0603TKY10K0" STA_RNCF0603_STP 143.321,91.517 r270 top
U1 "NCD2400MTR" DFN-6_IXY 185.313,120.992 r0 top
U2 "NCD2400MTR" DFN-6_IXY 73.062,218.377 r180 top
U3 "NCD2400MTR" DFN-6_IXY 131.953,225.895 r180 top
U4 "NCD2400MTR" DFN-6_IXY 180.484,129.406 r90 top
U5 "NCD2400MTR" DFN-6_IXY 77.891,209.962 r270 top
U6 "NCD2400MTR" DFN-6_IXY 136.782,217.48 r270 top
U7 "NCD2400MTR" DFN-6_IXY 184.987,147.269 r0 top
U8 "NCD2400MTR" DFN-6_IXY 73.249,191.718 r180 top
U9 "NCD2400MTR" DFN-6_IXY 132.279,199.618 r180 top
U10 "NCD2400MTR" DFN-6_IXY 180.673,138.863 r270 top
U11 "NCD2400MTR" DFN-6_IXY 77.922,200.124 r90 top
U12 "NCD2400MTR" DFN-6_IXY 136.593,208.023 r90 top
U13 "NCD2400MTR" DFN-6_IXY 179.275,90.532 r0 top
U14 "NCD2400MTR" DFN-6_IXY 173.478,220.9 r0 top
U15 "NCD2400MTR" DFN-6_IXY 73.311,185.099 r180 top
U16 "NCD2400MTR" DFN-6_IXY 174.447,98.947 r90 top
U17 "NCD2400MTR" DFN-6_IXY 168.468,212.345 r270 top
U18 "NCD2400MTR" DFN-6_IXY 178.95,116.809 r0 top
U19 "NCD2400MTR" DFN-6_IXY 78.14,176.684 r270 top
U20 "NCD2400MTR" DFN-6_IXY 174.123,194.824 r0 top
U21 "NCD2400MTR" DFN-6_IXY 229.413,93.717 r0 top
U22 "NCD2400MTR" DFN-6_IXY 73.82,158.73 r180 top
U23 "NCD2400MTR" DFN-6_IXY 174.636,108.403 r270 top
U24 "NCD2400MTR" DFN-6_IXY 168.57,203.387 r90 top
U25 "NCD2400MTR" DFN-6_IXY 224.584,102.132 r90 top
U26 "NCD2400MTR" DFN-6_IXY 78.133,167.136 r90 top
U27 "NCD2400MTR" DFN-6_IXY 229.087,119.994 r0 top
U28 "NCD2400MTR" DFN-6_IXY 74.239,150.72 r180 top
U29 "NCD2400MTR" DFN-6_IXY 224.773,111.589 r270 top
U30 "NCD2400MTR" DFN-6_IXY 79.067,142.306 r270 top
U31 "NCD2400MTR" DFN-6_IXY 188.173,156.405 r0 top
U32 "NCD2400MTR" DFN-6_IXY 74.565,124.443 r180 top
U33 "NCD2400MTR" DFN-6_IXY 183.345,164.82 r90 top
U34 "NCD2400MTR" DFN-6_IXY 78.878,132.849 r90 top
U35 "NCD2400MTR" DFN-6_IXY 187.847,182.682 r0 top
U36 "NCD2400MTR" DFN-6_IXY 183.534,174.277 r270 top
U37 "SN74AUP1T17DCKR" DCK5 231.312,43.662 r0 top
U38 "SN74AUP1T17DCKR" DCK5 249.089,43.572 r0 top
U39 "SN74AUP1T17DCKR" DCK5 140.631,43.531 r0 top
U40 "SN74AUP1T17DCKR" DCK5 149.587,43.598 r0 top
U41 "SN74AUP1T17DCKR" DCK5 158.64,43.544 r0 top
U42 "SN74AUP1T17DCKR" DCK5 167.7,43.593 r0 top
U43 "SN74AUP1T17DCKR" DCK5 222.349,43.553 r0 top
U44 "SN74AUP1T17DCKR" DCK5 195.403,43.633 r0 top
U45 "SN74AUP1T17DCKR" DCK5 213.42,43.582 r0 top
U46 "SN74AUP1T17DCKR" DCK5 177.069,43.593 r0 top
U47 "SN74AUP1T17DCKR" DCK5 186.442,43.638 r0 top
U48 "SN74AUP1T17DCKR" DCK5 240.16,43.601 r0 top
U49 "SN74AUP1T17DCKR" DCK5 204.572,43.643 r0 top
U50 "DEV-16771" MODULE_DEV-16771 35.24,35.729 r0 bottom
U51 "DEV-16771" MODULE_DEV-16771 101.938,36.594 r180 bottom
U52 "DAC7614EB" DB20 314.621,150.061 r0 top
U53 "ISL60002BIH325Z-T7A" P3_064_INR 290.838,128.835 r0 top
U54 "DAC7614EB" DB20 314.727,132.276 r0 top
U55 "TLV2771CDBVR" DBV5 280.305,110.43 r0 top
U56 "BC807-25WT1G" SOT-323-3_2P2X1P35_ONS 289.089,110.104 r270 top
U57 "TLV2771CDBVR" DBV5 280.406,94.479 r0 top
U58 "BC807-25WT1G" SOT-323-3_2P2X1P35_ONS 289.19,94.153 r270 top
U59 "LP3961ES-2.5" TS5B_TEX 284.982,149.338 r0 top
U60 "TLV2771CDBVR" DBV5 304.303,94.069 r0 top
U61 "BC807-25WT1G" SOT-323-3_2P2X1P35_ONS 312.72,93.819 r270 top
U62 "PGA855RGTR" VQFN16_RGT_TEX 291.833,215.475 r90 top
U63 "PGA855RGTR" VQFN16_RGT_TEX 218.557,208.103 r90 top
U64 "THS4521IDR" D8 253.532,210.386 r0 top
U65 "THS4521IDR" D8 237.416,161.802 r0 top
U66 "SN74AUP1T17DCKR" DCK5 138.277,110.617 r0 top
U67 "PGA855RGTR" VQFN16_RGT_TEX 320.752,215.531 r90 top
U68 "THS4521IDR" D8 299.139,174.027 r270 top
U69 "DAC7614EB" DB20 314.511,113.122 r0 top
VDD_1 "Red" LED-0603-RED 40.998,221.024 r0 top

## Footprints (in the part's own frame and the unit in brackets; to place one, negate y for a bottom-side part, rotate by r counter-clockwise, add the part's x,y. Pads: shape width x height; smd on the part's side, far side on the other; paste and mask are expansions set on the pad)
CAP_3216_TDK [mil]
  rect 21.78x71 smd paste+0 mask+0: 1(-69.89,0) 2(69.89,0)
  silkscreen extent -117,-40 47,41, body extent -67,-36 67,36, height 49
CAP_4532_TDK [mil]
  rect 21.78x142 smd paste+0 mask+0: 1(-99.39,0) 2(99.39,0)
  silkscreen extent -146,-76 76,76, body extent -96,-71 96,71, height 110
CAP_CML_0805_.3pF-1500pF,4700pF_STP [mil]
  rect 42x57 smd paste+0 mask+0: 1(-36.5,0) 2(36.5,0)
  silkscreen extent -3,-34 3,33, body extent -44,-29 44,29, height 30
CAPC1608N [mm]
  round 0.254 on Mech14: 0(0,0)
  rrect25% 0.9x1 smd: 1(-0.85,0) 2(0.85,0)
  Top Layer pour cut-out: -0.4,0.6 0.4,0.6 0.4,-0.6 -0.4,-0.6
  silkscreen extent -0.18,-0.48 0.18,0.48, body extent -0.85,-0.45 0.85,0.45, height 0.89
CAPC17595_87N_KEM [mm]
  rect 1.006x0.95 smd paste+0 mask+0: 1(-0.728,0) 2(0.728,0)
  body extent -0.87,-0.48 0.87,0.48, height 0.87
CAPMP2012X150USR [mm]
  round 0.254 on Mech14: 0(0,0)
  rrect25% 1.35x1.2 smd: 1(-0.95,0) 2(0.95,0)
  Top Layer pour cut-out: -0.4,0.8 0.4,0.8 0.4,-0.8 -0.4,-0.8
  silkscreen extent -1,-1.2 0.6,1.2, body extent -1.02,-0.67 1.03,0.68, height 1.5
CONN1_FCR7350R_CLF [mil]
  round 107 hole 87 mask+0: 1(0,0)
  round 67 hole 47: 2(-200,149.61) 3(200,149.61) 4(-200,-250.39) 5(200,-250.39)
  silkscreen extent -281,-1087 241,222, body extent 0,0 10,10, height 10
CONN5_VB335_CIN [mm]
  round 1.6 hole 1.1 paste-0.749 mask+0: 1(0,0)
  round 1.905 / inner round 1.524 / far side round 1.905 hole 1.397 paste-0.953 mask+0: 2(-3.125,3.125) 3(-3.125,-3.125) 4(3.125,-3.125) 5(3.125,3.125)
  silkscreen extent -5.63,-5.63 5.63,5.63
CONN_90120-0761_MOL [mil]
  round 63 hole 43 mask+0: 1(0,0)
  silkscreen extent -140,-55 55,55, body extent 0,0 10,10, height 10
CONN_CONBN_LNX [mil]
  round 55 / inner round 60 / far side round 55 hole 35 paste-27.5 mask+0: 1(-100,-293.5) 2(0,-293.5)
  round 79 / inner round 60 / far side round 79 hole 79 unplated paste-39.5 mask-39.5: 3(-200,-93.5) 5(200,-93.5)
  silkscreen extent -295,-298 295,1098
D8 [mil]
  rect 78x22 smd paste-39 mask-39: 1(-97,75) 2(-97,25) 3(-97,-25) 4(-97,-75) 5(97,-75) 6(97,-25) 7(97,25) 8(97,75)
  rect 78x22 on Top Solder paste-39 mask-39: 1(-97,75) 2(-97,25) 3(-97,-25) 4(-97,-75) 5(97,-75) 6(97,-25) 7(97,25) 8(97,75)
  rect 78x22 on Top Paste paste-39 mask-39: 1(-97,75) 2(-97,25) 3(-97,-25) 4(-97,-75) 5(97,-75) 6(97,-25) 7(97,25) 8(97,75)
  silkscreen extent -54,-98 54,98, body extent -122,-99 122,99, height 69
DB20 [mil]
  rect 64.56x16.97 smd paste+0 mask+0: 1(-143,115.16) 2(-143,89.57) 3(-143,63.98) 4(-143,38.39) 5(-143,12.79) 6(-143,-12.8) 7(-143,-38.39) 8(-143,-63.98) 9(-143,-89.57) 10(-143,-115.16) 11(143,-115.16) 12(143,-89.57) 13(143,-63.98) 14(143,-38.39) 15(143,-12.8) 16(143,12.79) 17(143,38.39) 18(143,63.98) 19(143,89.57) 20(143,115.16)
  silkscreen extent -195,-152 195,153, body extent -161,-147 161,147, height 79
DBV5 [mil]
  rect 38.28x20 smd paste+0 mask+0: 1(-53.64,37.4) 2(-53.64,0) 3(-53.64,-37.4) 4(53.64,-37.4) 5(53.64,37.4)
  silkscreen extent -40,-65 40,65, body extent -59,-60 59,60, height 57
DCK5 [mil]
  rect 46x14 on Top Paste paste-23 mask-23: 1(-41.04,25.55) 2(-41.04,-0.04) 3(-41.04,-25.63) 4(40.96,-25.63) 5(40.96,25.55)
  rect 46x14 smd paste-23 mask-23: 1(-41,25.59) 2(-41,0) 3(-41,-25.59) 4(41,-25.59) 5(41,25.59)
  rect 46x14 on Top Solder paste-23 mask-23: 1(-41,25.59) 2(-41,0) 3(-41,-25.59) 4(41,-25.59) 5(41,25.59)
  silkscreen extent -9,-42 28,42, body extent -47,-43 47,43, height 43
DFN-6_IXY [mil]
  rect 24x12 smd paste+0 mask+0: 1(-40.5,25.59) 2(-40.5,0) 3(-40.5,-25.59) 4(40.5,-25.59) 5(40.5,0) 6(40.5,25.59)
  rect 41x65 smd paste+0 mask+0: 7(0,0)
  silkscreen extent -84,-45 45,46, body extent -41,-41 41,41, height 32
HARWIN_S1711-46R [mm]
  rect 9.4x2.28 smd: 1(0,0)
  silkscreen extent -4.39,-1.46 4.39,1.46
HDR1X2 [mm] "Connector; Header; 2 Position"
  rect 1.5x1.5 hole 0.9: 1(0,0)
  round 1.5 hole 0.9: 2(2.54,0)
  silkscreen extent -1.27,-1.27 3.81,1.27
HDR1X3 [mm] "Connector; Header; 3 Position"
  rect 1.5x1.5 hole 0.9: 1(0,0)
  round 1.5 hole 0.9: 2(2.54,0) 3(5.08,0)
  silkscreen extent -1.27,-1.27 6.35,1.27
HDR2X4 [mm] "Connector; Header; 4x2 Position"
  rect 1.5x1.5 hole 0.9: 1(0,0)
  round 1.5 hole 0.9: 2(0,2.54) 3(2.54,0) 4(2.54,2.54) 5(5.08,0) 6(5.08,2.54) 7(7.62,0) 8(7.62,2.54)
  silkscreen extent -1.27,-1.27 8.89,3.81
HDRV96W64P254_3X32_8128X749X838P [mm]
  rect 1.65x1.65 / inner round 1.65 / far side rect 1.65x1.65 hole 1.1: 1(0,0)
  round 1.65 hole 1.1: 2(0,2.54) 3(0,5.08) 4(2.54,0) 5(2.54,2.54) 6(2.54,5.08) 7(5.08,0) 8(5.08,2.54) 9(5.08,5.08) 10(7.62,0) 11(7.62,2.54) 12(7.62,5.08) 13(10.16,0) 14(10.16,2.54) 15(10.16,5.08) 16(12.7,0) 17(12.7,2.54) 18(12.7,5.08) 19(15.24,0) 20(15.24,2.54) 21(15.24,5.08) 22(17.78,0) 23(17.78,2.54) 24(17.78,5.08) 25(20.32,0) 26(20.32,2.54) 27(20.32,5.08) 28(22.86,0) 29(22.86,2.54) 30(22.86,5.08) 31(25.4,0) 32(25.4,2.54) 33(25.4,5.08) 34(27.94,0) 35(27.94,2.54) 36(27.94,5.08) 37(30.48,0) 38(30.48,2.54) 39(30.48,5.08) 40(33.02,0) 41(33.02,2.54) 42(33.02,5.08) 43(35.56,0) 44(35.56,2.54) 45(35.56,5.08) 46(38.1,0) 47(38.1,2.54) 48(38.1,5.08) 49(40.64,0) 50(40.64,2.54) 51(40.64,5.08) 52(43.18,0) 53(43.18,2.54) 54(43.18,5.08) 55(45.72,0) 56(45.72,2.54) 57(45.72,5.08) 58(48.26,0) 59(48.26,2.54) 60(48.26,5.08) 61(50.8,0) 62(50.8,2.54) 63(50.8,5.08) 64(53.34,0) 65(53.34,2.54) 66(53.34,5.08) 67(55.88,0) 68(55.88,2.54) 69(55.88,5.08) 70(58.42,0) 71(58.42,2.54) 72(58.42,5.08) 73(60.96,0) 74(60.96,2.54) 75(60.96,5.08) 76(63.5,0) 77(63.5,2.54) 78(63.5,5.08) 79(66.04,0) 80(66.04,2.54) 81(66.04,5.08) 82(68.58,0) 83(68.58,2.54) 84(68.58,5.08) 85(71.12,0) 86(71.12,2.54) 87(71.12,5.08) 88(73.66,0) 89(73.66,2.54) 90(73.66,5.08) 91(76.2,0) 92(76.2,2.54) 93(76.2,5.08) 94(78.74,0) 95(78.74,2.54) 96(78.74,5.08)
  silkscreen extent -1.27,-1.2 80.01,6.28
HRS_DF17(4.0)-40DP-0.5V(57) [mm]
  rect 0.25x1.15 smd: 1(-4.75,-2.575) 2(-4.75,2.575) 3(-4.25,-2.575) 4(-4.25,2.575) 5(-3.75,-2.575) 6(-3.75,2.575) 7(-3.25,-2.575) 8(-3.25,2.575) 9(-2.75,-2.575) 10(-2.75,2.575) 11(-2.25,-2.575) 12(-2.25,2.575) 13(-1.75,-2.575) 14(-1.75,2.575) 15(-1.25,-2.575) 16(-1.25,2.575) 17(-0.75,-2.575) 18(-0.75,2.575) 19(-0.25,-2.575) 20(-0.25,2.575) 21(0.25,-2.575) 22(0.25,2.575) 23(0.75,-2.575) 24(0.75,2.575) 25(1.25,-2.575) 26(1.25,2.575) 27(1.75,-2.575) 28(1.75,2.575) 29(2.25,-2.575) 30(2.25,2.575) 31(2.75,-2.575) 32(2.75,2.575) 33(3.25,-2.575) 34(3.25,2.575) 35(3.75,-2.575) 36(3.75,2.575) 37(4.25,-2.575) 38(4.25,2.575) 39(4.75,-2.575) 40(4.75,2.575)
  rect 1.4x2.1 smd: S1(-7,0) S2(7,0)
  round 0.6 hole 0.6 unplated: ""(-6,-1.9) ""(6,-1.9)
  Keep-Out Layer region: 6.3,-2.002 -6.305,-2.002 -6.305,2 6.3,2
  silkscreen extent -7.5,-3.25 7.5,2.35
LED-0603-RED [mm]
  round 0.254 on Mech14: 0(0,0)
  rrect25% 0.8x0.8 smd: A(-0.85,0) K(0.85,0)
  Top Layer pour cut-out: -0.5,0.5 0.5,0.5 0.5,-0.5 -0.5,-0.5
  silkscreen extent -1.55,-0.67 1.68,0.67, body extent -0.8,-0.4 0.8,0.4, height 0.75
MODULE_DEV-16771 [mm]
  round 1.308 hole 0.8: 0(-26.67,-7.62) 1(-24.13,-7.62) 2(-21.59,-7.62) 3(-19.05,-7.62) 3.3V_1(6.35,-7.62) 3.3V_2(-24.13,7.62) 3.3V_3(16.51,-2.54) 4(-16.51,-7.62) 5(-13.97,-7.62) 6(-11.43,-7.62) 7(-8.89,-7.62) 8(-6.35,-7.62) 9(-3.81,-7.62) 10(-1.27,-7.62) 11(1.27,-7.62) 12(3.81,-7.62) 13(3.81,7.62) 14(1.27,7.62) 15(-1.27,7.62) 16(-3.81,7.62) 17(-6.35,7.62) 18(-8.89,7.62) 19(-11.43,7.62) 20(-13.97,7.62) 21(-16.51,7.62) 22(-19.05,7.62) 23(-21.59,7.62) 24(8.89,-7.62) 25(11.43,-7.62) 26(13.97,-7.62) 27(16.51,-7.62) 28(19.05,-7.62) 29(21.59,-7.62) 30(24.13,-7.62) 31(26.67,-7.62) 32(29.21,-7.62) 33(29.21,7.62) 34(26.67,7.62) 35(24.13,7.62) 36(21.59,7.62) 37(19.05,7.62) 38(16.51,7.62) 39(13.97,7.62) 40(11.43,7.62) 41(8.89,7.62) GND1(-29.21,-7.62) GND2(6.35,7.62) GND3(-26.67,7.62) GND4(16.51,0) ON/OFF(16.51,5.08) PROGRAM(16.51,2.54) VBAT(16.51,-5.08) VIN(-29.21,7.62) VUSB(-26.67,5.08)
  round 1.258 hole 0.75: 5V(-22.86,-4.57) D+(-17.78,-4.57) D-(-20.32,-4.57) USB_GND1(-15.24,-4.57) USB_GND2(-12.7,-4.57)
  round 1.208 hole 0.7: GND5(-14.24,3.17) LED(-16.24,3.17) R+(-16.24,5.17) R-(-14.24,5.17) T+(-14.24,1.17) T-(-16.24,1.17)
  silkscreen extent -31.18,-9.6 30.48,8.89, body extent -31.18,-8.89 30.48,8.89, height 7.15
P3_064_INR [mil]
  rect 22x47 smd paste+0 mask+0: 1(-37.4,-42.5) 2(37.4,-42.5) 3(0,42.5)
  silkscreen extent -115,-57 65,32, body extent -60,-52 60,52, height 44
RC0603N_PAN [mm]
  rect 0.756x0.8 smd paste+0 mask+0: 1(-0.778,0) 2(0.778,0)
  silkscreen extent -0.09,-0.53 0.09,0.53, body extent -0.8,-0.4 0.8,0.4, height 0.71
RC0805N_PAN [mm]
  rect 1.006x1.2 smd paste+0 mask+0: 1(-0.853,0) 2(0.853,0)
  body extent -1,-0.6 1,0.6, height 0.71
RCL0612_VIS [mm]
  rect 0.703x3.4 smd paste+0 mask+0: 1(-0.752,0) 2(0.752,0)
  body extent -0.9,-1.7 0.9,1.7, height 0.65
RES_ERA6A_0805_PAN [mil]
  rect 34x53 smd paste+0 mask+0: 1(-34.5,0) 2(34.5,0)
  silkscreen extent -5,-32 5,32, body extent -44,-26 44,26, height 24
RES_RNCF0603_STP [mil]
  rect 34x35 smd paste+0 mask+0: 1(-29.5,0) 2(29.5,0)
  body extent -33,-17 33,17, height 22
RESC1608N [mm]
  round 0.254 on Mech14: 0(0,0)
  rrect25% 0.9x1 smd: 1(-0.85,0) 2(0.85,0)
  Top Layer pour cut-out: -0.4,0.6 0.4,0.6 0.4,-0.6 -0.4,-0.6
  silkscreen extent -0.15,-0.41 0.15,0.41, body extent -0.87,-0.47 0.88,0.48, height 0.54
SAMTEC_ASP-127797-01 [mm]
  round 0.64 smd paste+0.125: C01(24.765,3.175) C02(23.495,3.175) C03(22.225,3.175) C04(20.955,3.175) C05(19.685,3.175) C06(18.415,3.175) C07(17.145,3.175) C08(15.875,3.175) C09(14.605,3.175) C10(13.335,3.175) C11(12.065,3.175) C12(10.795,3.175) C13(9.525,3.175) C14(8.255,3.175) C15(6.985,3.175) C16(5.715,3.175) C17(4.445,3.175) C18(3.175,3.175) C19(1.905,3.175) C20(0.635,3.175) C21(-0.635,3.175) C22(-1.905,3.175) C23(-3.175,3.175) C24(-4.445,3.175) C25(-5.715,3.175) C26(-6.985,3.175) C27(-8.255,3.175) C28(-9.525,3.175) C29(-10.795,3.175) C30(-12.065,3.175) C31(-13.335,3.175) C32(-14.605,3.175) C33(-15.875,3.175) C34(-17.145,3.175) C35(-18.415,3.175) C36(-19.685,3.175) C37(-20.955,3.175) C38(-22.225,3.175) C39(-23.495,3.175) C40(-24.765,3.175) D01(24.765,1.905) D02(23.495,1.905) D03(22.225,1.905) D04(20.955,1.905) D05(19.685,1.905) D06(18.415,1.905) D07(17.145,1.905) D08(15.875,1.905) D09(14.605,1.905) D10(13.335,1.905) D11(12.065,1.905) D12(10.795,1.905) D13(9.525,1.905) D14(8.255,1.905) D15(6.985,1.905) D16(5.715,1.905) D17(4.445,1.905) D18(3.175,1.905) D19(1.905,1.905) D20(0.635,1.905) D21(-0.635,1.905) D22(-1.905,1.905) D23(-3.175,1.905) D24(-4.445,1.905) D25(-5.715,1.905) D26(-6.985,1.905) D27(-8.255,1.905) D28(-9.525,1.905) D29(-10.795,1.905) D30(-12.065,1.905) D31(-13.335,1.905) D32(-14.605,1.905) D33(-15.875,1.905) D34(-17.145,1.905) D35(-18.415,1.905) D36(-19.685,1.905) D37(-20.955,1.905) D38(-22.225,1.905) D39(-23.495,1.905) D40(-24.765,1.905) G01(24.765,-1.905) G02(23.495,-1.905) G03(22.225,-1.905) G04(20.955,-1.905) G05(19.685,-1.905) G06(18.415,-1.905) G07(17.145,-1.905) G08(15.875,-1.905) G09(14.605,-1.905) G10(13.335,-1.905) G11(12.065,-1.905) G12(10.795,-1.905) G13(9.525,-1.905) G14(8.255,-1.905) G15(6.985,-1.905) G16(5.715,-1.905) G17(4.445,-1.905) G18(3.175,-1.905) G19(1.905,-1.905) G20(0.635,-1.905) G21(-0.635,-1.905) G22(-1.905,-1.905) G23(-3.175,-1.905) G24(-4.445,-1.905) G25(-5.715,-1.905) G26(-6.985,-1.905) G27(-8.255,-1.905) G28(-9.525,-1.905) G29(-10.795,-1.905) G30(-12.065,-1.905) G31(-13.335,-1.905) G32(-14.605,-1.905) G33(-15.875,-1.905) G34(-17.145,-1.905) G35(-18.415,-1.905) G36(-19.685,-1.905) G37(-20.955,-1.905) G38(-22.225,-1.905) G39(-23.495,-1.905) G40(-24.765,-1.905) H01(24.765,-3.175) H02(23.495,-3.175) H03(22.225,-3.175) H04(20.955,-3.175) H05(19.685,-3.175) H06(18.415,-3.175) H07(17.145,-3.175) H08(15.875,-3.175) H09(14.605,-3.175) H10(13.335,-3.175) H11(12.065,-3.175) H12(10.795,-3.175) H13(9.525,-3.175) H14(8.255,-3.175) H15(6.985,-3.175) H16(5.715,-3.175) H17(4.445,-3.175) H18(3.175,-3.175) H19(1.905,-3.175) H20(0.635,-3.175) H21(-0.635,-3.175) H22(-1.905,-3.175) H23(-3.175,-3.175) H24(-4.445,-3.175) H25(-5.715,-3.175) H26(-6.985,-3.175) H27(-8.255,-3.175) H28(-9.525,-3.175) H29(-10.795,-3.175) H30(-12.065,-3.175) H31(-13.335,-3.175) H32(-14.605,-3.175) H33(-15.875,-3.175) H34(-17.145,-3.175) H35(-18.415,-3.175) H36(-19.685,-3.175) H37(-20.955,-3.175) H38(-22.225,-3.175) H39(-23.495,-3.175) H40(-24.765,-3.175)
  round 1.27 hole 1.27 unplated: ""(-27.19,-3.05) ""(27.19,0)
  silkscreen extent -27.89,-7.34 28.78,7.34
SMB_V-RJ45 [mm] "Connector; SMB Straight"
  round 2.5 hole 1.5: 1(0,0) 2(-2.5,-2.5) 2(-2.5,2.5) 2(2.5,-2.5) 2(2.5,2.5)
  silkscreen extent -3.15,-3.15 3.15,3.15
SOT-323-3_2P2X1P35_ONS [mil]
  rect 18x45 smd paste+0 mask+0: 1(-27.5,-39) 2(27.5,-39) 3(0,39)
  silkscreen extent -49,-94 48,31, body extent -44,-48 44,48, height 40
STA_RMCF0603_STP [mil]
  rect 28x37 smd paste+0 mask+0: 1(-27.5,0) 2(27.5,0)
  body extent -34,-19 34,19, height 22
STA_RNCF0603_STP [mil]
  rect 28x39 smd paste+0 mask+0: 1(-29.5,0) 2(29.5,0)
  body extent -36,-19 36,19, height 22
TS5B_TEX [mil]
  rect 39.97x105.56 smd paste+0 mask+0: 1(-134,-326) 2(-67,-326) 3(0,-326) 4(67,-326) 5(134,-326)
  rect 412x428 smd paste+0 mask+0: 6(0,0)
  silkscreen extent -153,-259 153,-227, body extent -205,-278 205,200, height 189
VQFN16_RGT_TEX [mil]
  rect 32x10 smd paste+0 mask+0: 1(-57,29.54) 2(-57,9.85) 3(-57,-9.84) 4(-57,-29.53) 9(57,-29.53) 10(57,-9.84) 11(57,9.85) 12(57,29.54)
  rect 10x32 smd paste+0 mask+0: 5(-29.53,-57) 6(-9.84,-57) 7(9.85,-57) 8(29.54,-57) 13(29.54,57) 14(9.85,57) 15(-9.84,57) 16(-29.53,57)
  rect 69x69 smd paste+0 mask+0: 17(0,0)
  silkscreen extent -66,-66 93,66, body extent -61,-61 61,61, height 39

## Part data
C1 C3 C4 C7 C9 C10 C13 C15 C17 C19 C21 C23 C25 C27 C29 C31 C33 C35 C45 C46 C47 C48 C49 C50 C51 C55 C56 C57 C59 C61 C63 C64 C66 C67 C69 C71 C72 C74 C77 C79 C84 C86 C98 C99 C103 C104 C110 C111 C114 C120 C123 C124 C127 C129: library part CAPC_100n_0603, "Capacitor SMD Cer 100nF 10% 50V X7R 0603", Manufacturer 1="AVX Corporation", Manufacturer 2="TDK Corporation", Manufacturer Part Number 1=06035C104KAT2A, Manufacturer Part Number 2=C1608X7R1H104K, Package / Case="0603 (1608 Metric)", Ratings="50V; X7R", Supplier Part Number 1=478-5052-1-ND, Tolerance=±10%, ComponentLink1Description=http://www.avx.com/docs/Catalogs/cx7r.pdf, ComponentLink1URL=http://www.avx.com/docs/Catalogs/cx7r.pdf, ComponentLink2Description=http://product.tdk.com/capacitor/mlcc/en/documents/mlcc_commercial_general_en.pdf, ComponentLink2URL=http://product.tdk.com/capacitor/mlcc/en/documents/mlcc_commercial_general_en.pdf, Material=ceramic, Supplier 1=Digi-Key, Supplier 2=Digi-Key, Supplier Part Number 2=445-1314-1-ND
C2 C5 C6 C8 C11 C12 C14 C16 C18 C20 C22 C24 C26 C28 C30 C32 C34 C36 C37 C38 C39 C40 C41 C42 C43 C44 C52 C53 C54 C58 C60 C62 C65 C68 C70 C73 C75 C78 C80 C85 C87 C97 C100 C101 C105 C106 C112 C113 C119 C121 C125 C128 C130 C131 C132 C133: library part CAPT_10u_0805_10V, "Capacitor SMD Tantalum 10uF 20% 10V 0805", Manufacturer 1="AVX Corporation", Manufacturer Part Number 1=TAJP106M010RNJ, Package / Case="0805 (2012 metric)", Ratings=10V, Supplier Part Number 1=478-3281-1-ND, Tolerance=±20%, Material=Tantalum, Supplier 1=Digi-Key
C76 C81 C88: library part CAPC_47p_0603, "Capacitor SMD Cer 47pF 0603", Operating Temperature="-55°C ~ 125°C", Package / Case="0603 (1608 Metric)", Ratings="50V; NP0", Tolerance=±5%, ComponentLink1Description=http://www.avx.com/docs/Catalogs/ccog.pdf, ComponentLink1URL=http://www.avx.com/docs/Catalogs/ccog.pdf, ComponentLink2Description=http://www.tdk.com/pdf/tight_tol_B11.pdf, ComponentLink2URL=http://www.tdk.com/pdf/tight_tol_B11.pdf, ComponentLink3Description=http://www.kemet.com/datasheets&C0603C221F5GACTU, ComponentLink3URL=http://www.kemet.com/datasheets&C0603C221F5GACTU, Size / Dimension="0.063\" L x 0.031\" W (1.60mm x 0.80mm)", Thickness (Max)="0.037\" (0.95mm)"
C82 C83: "No Description Available", Mfr_Name=TDK, Copyright="Copyright (C) 2022 Ultra Librarian. All rights reserved.", RefDes=RefDes, Type=DEV
  C82: Manufacturer_Part_Number=C3216X5R1A686M160AC
  C83: Manufacturer_Part_Number=C4532X7R1C336M250KC
C89 C90 C108 C109 C115 C126: "No Description Available", Mfr_Name=Kemet
C91 C92 C93 C94 C95 C96 C102 C107 C116 C117 C118 C122 R6 R7 R8 R9 R10 R11 R12 R13 R14 R15 R16 R17 R18 R19 R20 R21 R22 R23 R28 R33 R34 R53 R56 R57 R58 R65 R66 R67 R68 R70 R72 R76 R77 R78 R79 R80 R81: "No Description Available", Mfr_Name="Stackpole International"
J1 J2 J3 J4 J5 J6 J7 J8 J9 J10: "No Description Available", Mfr_Name=Cliff, Copyright="Copyright (C) 2022 Ultra Librarian. All rights reserved.", Manufacturer_Part_Number=FCR7350R, RefDes=RefDes, Type=DEV
J11 J12 J13: "PC Board, Headers & Receptacles, hdr, fit, series, mount, pos, Connectors and Adapters, connector, header, Connectors...", Package=None, Availability=Unavailable, MP=DF17(4.0)-40DP-0.5V(57), Price=None
J14 J15: "RFI SHIELD CLIP TIN SMD", Package=None, Availability=Warning, Check_prices=https://www.snapeda.com/parts/S1711-46R/Harwin%20Inc./view-part/2172610/?ref=eda, MF="Harwin Inc.", MP=S1711-46R, Price=None, Purchase-URL=https://pricing.snapeda.com/search/part/S1711-46R/?ref=eda, SnapEDA_Link=https://www.snapeda.com/parts/S1711-46R/Harwin%20Inc./view-part/2172610/?ref=snap
J16: "No Description Available", Mfr_Name="Cinch Connectivity Solutions", RefDes=RefDes, Type="Coaxial Connectors(RF) Assemblies"
J17 J20: "No Description Available", Mfr_Name="Molex Connector Corporation", Copyright="Copyright (C) 2022 Ultra Librarian. All rights reserved.", Manufacturer_Part_Number=901200761, RefDes=RefDes, Type=DEV
J18: "160 Position Connector Array, Male Pins Surface Mount Gold", Package=None, Availability="In Stock", Check_prices=https://www.snapeda.com/parts/ASP-127797-01/Samtec+Inc./view-part/?ref=eda, MF="Samtec Inc.", MP=ASP-127797-01, Price=None, Purchase-URL=https://pricing.snapeda.com/search?q=ASP-127797-01&ref=eda, SnapEDA_Link=https://www.snapeda.com/parts/ASP-127797-01/Samtec+Inc./view-part/?ref=snap
J19: "CONN HEADER 96 POS .100\"", Manufacturer_Name=SAMTEC, Datasheet Link=http://suddendocs.samtec.com/catalog_english/tsw_th.pdf, Geometry.Height=8.38mm, Manufacturer_Part_Number=TSW-132-09-G-T
J21 J22 J23 J24 J25 J28 J29 J30 J31 J32 J33: "No Description Available", Mfr_Name="Linx Technologies", RefDes=RefDes, Type=Type
P1 P2 P3 P4 P5 P6 P7 P8 P9 P27 P28 P29 P30 P31 P32 P33 P34 P35 P36 P37 P38 P39 P40 P41 P42 P43 P49 P53 P58 P59 P60 P63 P70 P71 P74 P75: "Header, 2-Pin", LatestRevisionDate=17-Jul-2002, LatestRevisionNote="Re-released for DXP Platform.", Publisher="Altium Limited"
P10 P11 P13 P14 P15 P16 P17 P18 P19 P20 P21 P22 P23 P24 P25 P26: "SMB Straight Connector", LatestRevisionDate=17-Jul-2002, LatestRevisionNote="Re-released for DXP Platform.", Publisher="Altium Limited"
P12 P45 P46 P47 P48 P51 P52 P54 P55 P56 P57 P61 P62 P64 P65 P66 P67 P68 P69 P73: "Header, 3-Pin", LatestRevisionDate=17-Jul-2002, LatestRevisionNote="Re-released for DXP Platform.", Publisher="Altium Limited"
P44 P72: "Header, 4-Pin, Dual row", LatestRevisionDate=17-Jul-2002, LatestRevisionNote="Re-released for DXP Platform.", Publisher="Altium Limited"
R1: library part RES_866R_0603_1%_1, "Resistor SMD chip 866 Ohm 0.1W 1% 0603", Package / Case="0603 (1608 Metric)", Ratings=1/10W, Tolerance=±1%
R2 R3 R4 R5: "No Description Available", Mfr_Name=Vishay
R24 R25 R26 R27 R29 R30 R31 R32 R35 R36 R37 R38 R39 R40 R41 R42 R43 R44 R45 R46 R47 R48 R50 R51 R52 R54 R55 R59 R60 R61 R62 R63 R64 R69 R71 R73 R74 R75: "No Description Available", Mfr_Name=Panasonic
R49: library part RES_10K_0603_1%, "Resistor SMD chip 10k Ohm 0.1W 1% 0603", Manufacturer 1=Yageo, Manufacturer Part Number 1=RC0603FR-0710KL, Package / Case="0603 (1608 Metric)", Ratings=1/10W, Supplier Part Number 1=311-10.0KHRCT-ND, Tolerance=±1%, Supplier 1=Digi-Key
U1 U2 U3 U4 U5 U6 U7 U8 U9 U10 U11 U12 U13 U14 U15 U16 U17 U18 U19 U20 U21 U22 U23 U24 U25 U26 U27 U28 U29 U30 U31 U32 U33 U34 U35 U36: "No Description Available", Mfr_Name="Littelfuse / IXYS", RefDes=RefDes, Type=Type
U37 U38 U39 U40 U41 U42 U43 U44 U45 U46 U47 U48 U49 U52 U54 U55 U57 U59 U60 U62 U63 U64 U65 U66 U67 U68 U69: "No Description Available", Mfr_Name="Texas Instruments", RefDes=RefDes
  U37 U38 U39 U40 U41 U42 U43 U44 U45 U46 U47 U48 U49 U64 U65 U66 U68: Type=Type
  U52 U54 U69: Copyright="Copyright (C) 2022 Ultra Librarian. All rights reserved.", Manufacturer_Part_Number=DAC7614EB, Type=DEV
  U55 U57 U60: Copyright="Copyright (C) 2022 Ultra Librarian. All rights reserved.", Manufacturer_Part_Number=TLV2771CDBVR, Type=DEV
  U59: Copyright="Copyright (C) 2022 Ultra Librarian. All rights reserved.", Manufacturer_Part_Number=LP3961ES-2.5, Type=DEV
  U62 U63 U67: Type=Linear
U50 U51: "RT1062 Teensy 4.1 series ARM® Cortex®-M7 MPU Embedded Evaluation Board", Package=None, Check_prices=https://www.snapeda.com/parts/DEV-16771/SparkFun+Electronics/view-part/?ref=eda, MF="SparkFun Electronics", MP=DEV-16771, SnapEDA_Link=https://www.snapeda.com/parts/DEV-16771/SparkFun+Electronics/view-part/?ref=snap
U53: "No Description Available", Mfr_Name="Renesas / Intersil", RefDes=RefDes, Type=Type
U56 U58 U61: "No Description Available", Mfr_Name=onsemi, RefDes=RefDes, Type=Type
VDD_1: library part LED_SMD_Red_0603_220mcd, "LED 0603 SMD Hyper Red 630nm 220mcd 20mA", Manufacturer 1="Kingbright Corp", Manufacturer Part Number 1=APT1608SURCK, Package / Case="0603 (1608 metric)", Ratings="220 mcd; 630 nm", Supplier Part Number 1=754-1123-1-ND, Voltage - Forward (Vf) @ 10mA=1.9V, Voltage - Forward (Vf) Typ=1.95V, Material="AlGaInP on GaAs", Supplier 1=Digi-Key

## Free pads (board coordinates)
  round 3.508 hole 3 mask+0: 3(8.139,3.365) 3(13.354,241.272) 3(58.197,95.743) 3(129.713,151.619) 3(160.728,3.388) 3(185.299,62.022) 3(238.23,201.224) 3(260.118,121.89) 3(312.919,2.984) 3(344.731,249.608) 3(345.027,132.439)

## Via types
v1: diameter 0.4, hole 0.25, Top Layer to Bottom Layer, 1673 vias
v2: diameter 0.85, hole 0.5, Top Layer to Bottom Layer, 416 vias
v3: diameter 0.5, hole 0.3, Top Layer to Bottom Layer, 391 vias
v4: diameter 1.27, hole 0.711, Top Layer to Bottom Layer, 85 vias
v5: diameter 0.7, hole 0.4, Top Layer to Bottom Layer, 57 vias
v6: diameter 1.1, hole 0.7, Top Layer to Bottom Layer, 4 vias